# Altium PCB MB_v1.PcbDoc (part 1 of 10)
Units mm, origin at the board's own origin, x right, y up, seen from the top; angles counter-clockwise.
Board outline 203 x 72 mm, 6 copper layers (Top Layer, Layer 3, Layer 1, Layer 2, Layer 4, Bottom Layer), stack 1.52 mm thick; 655 components, 569 nets, 2943 pads, 1834 vias.
Unrouted connection lines stored in the file: 31.
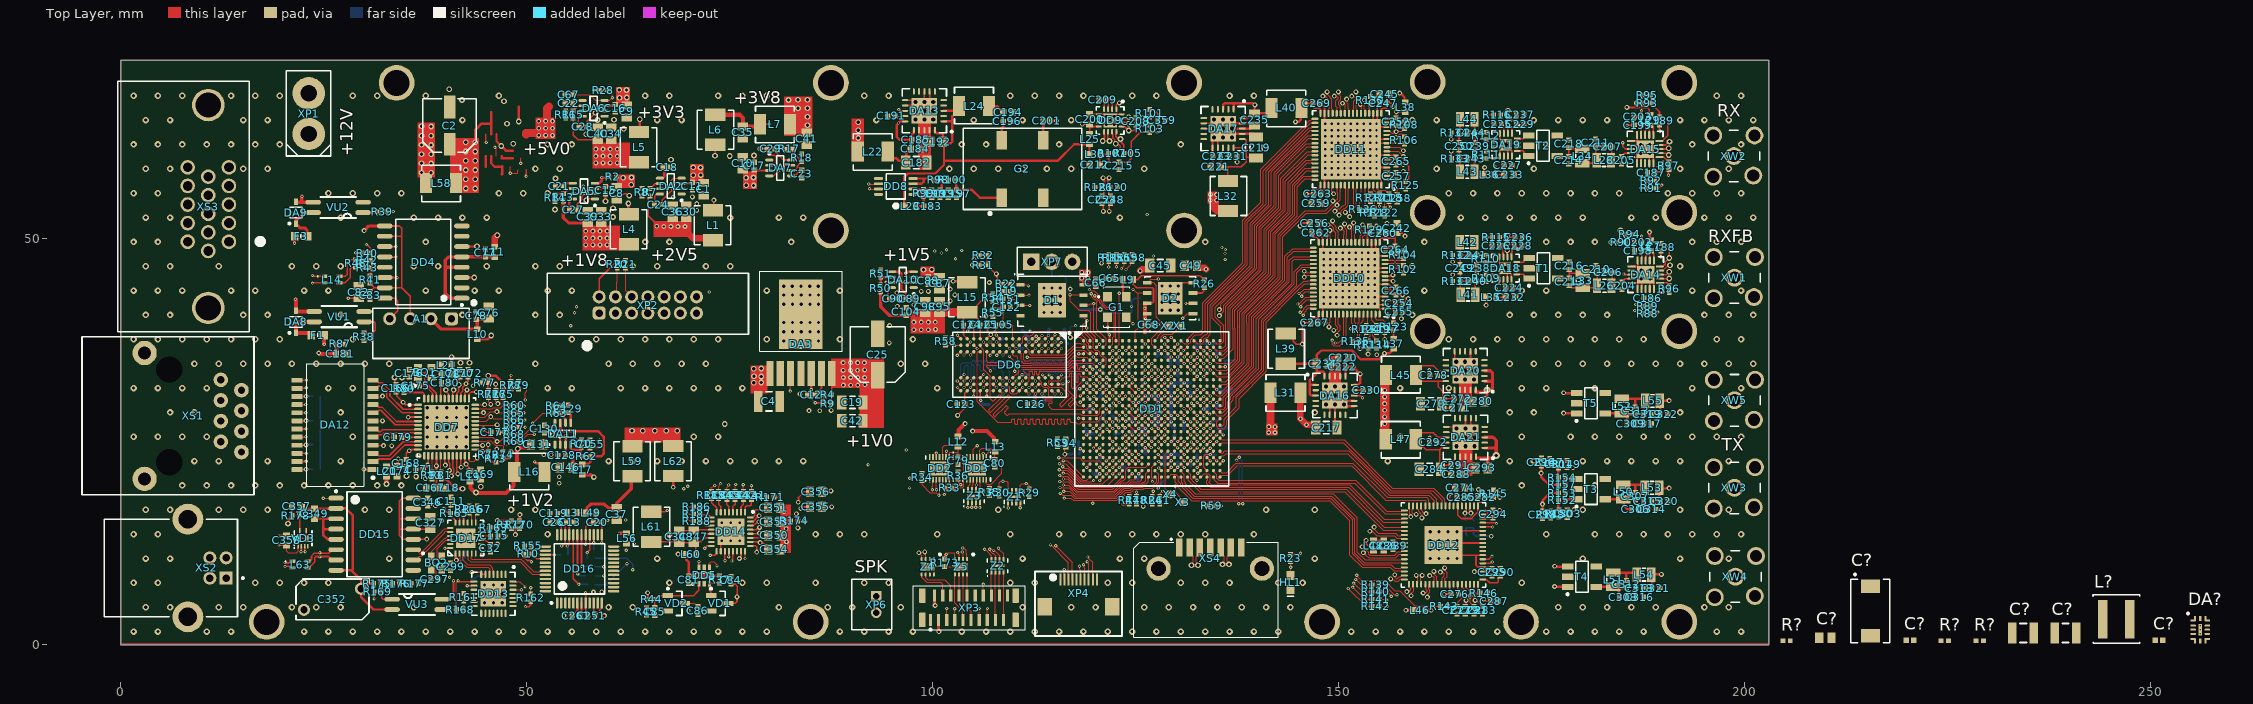
[diagram p0: Top Layer view]
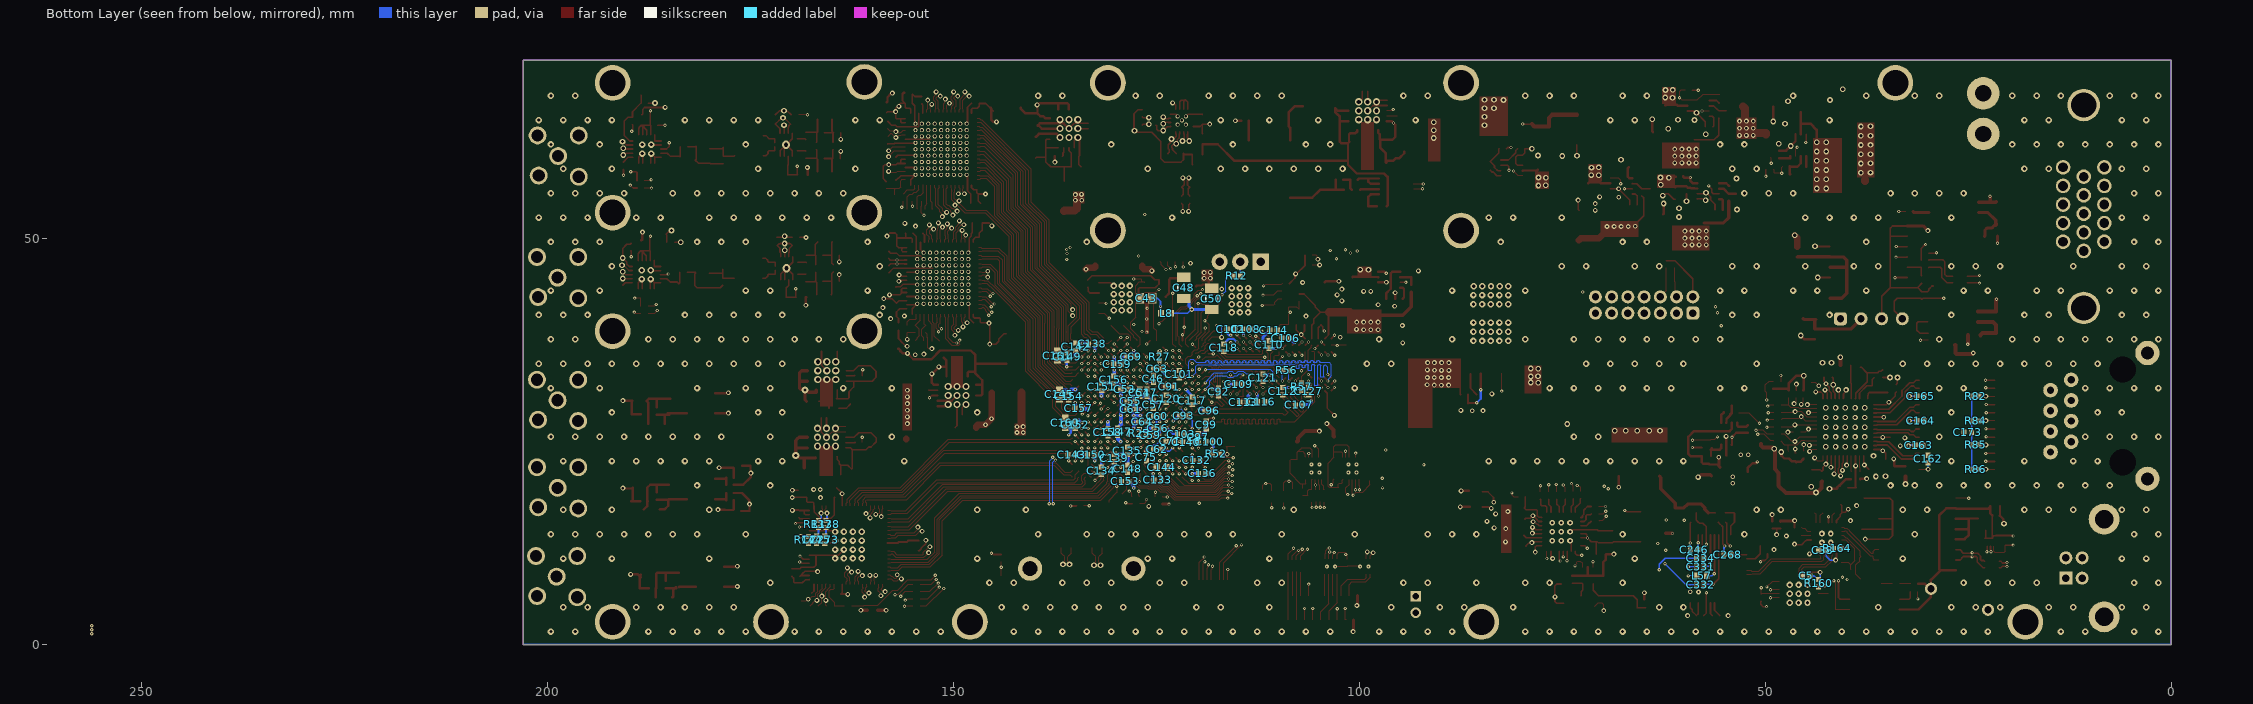
[diagram p1: Bottom Layer view, seen from below]
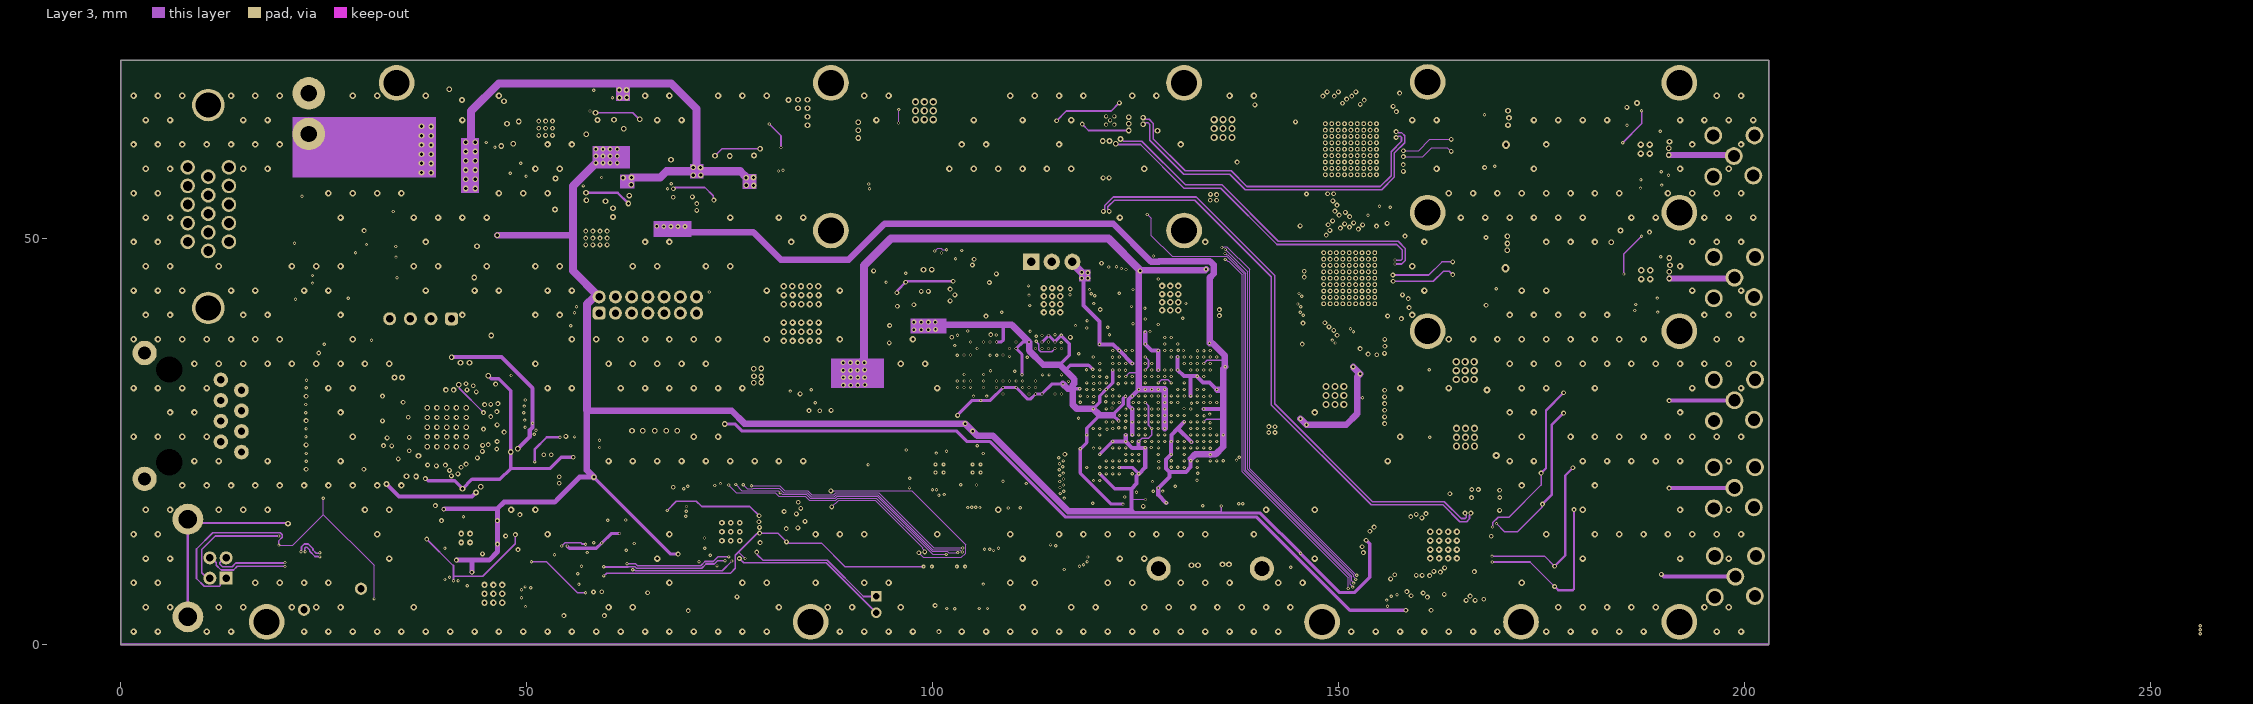
[diagram p2: Layer 3]
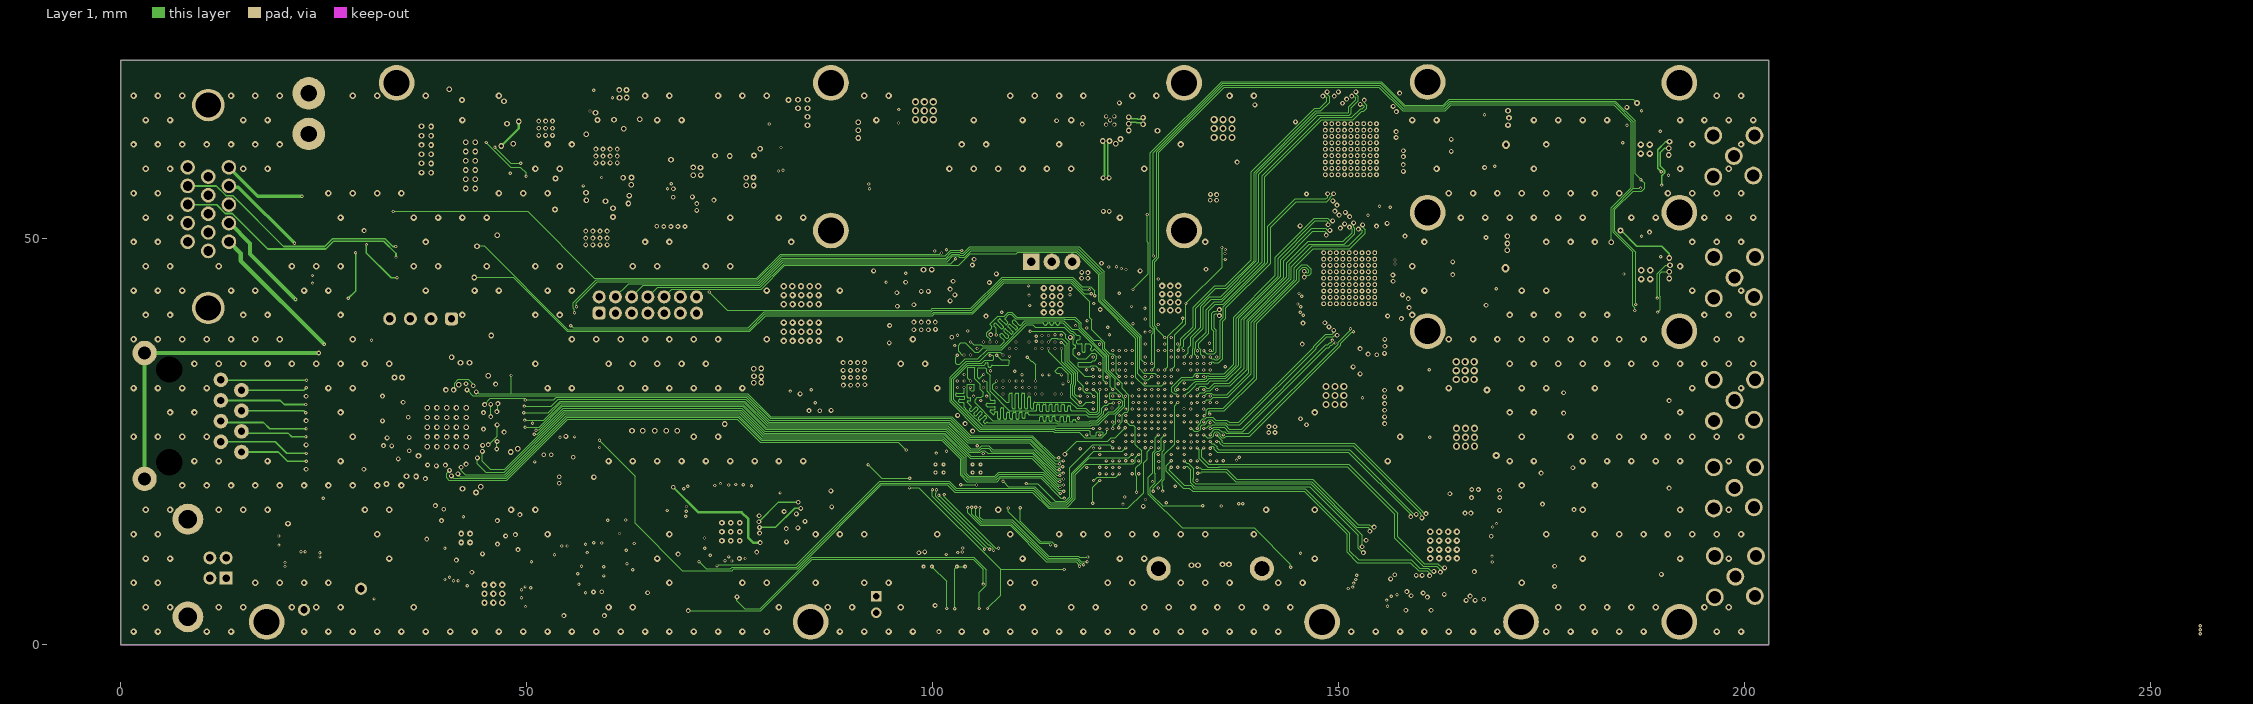
[diagram p3: Layer 1]
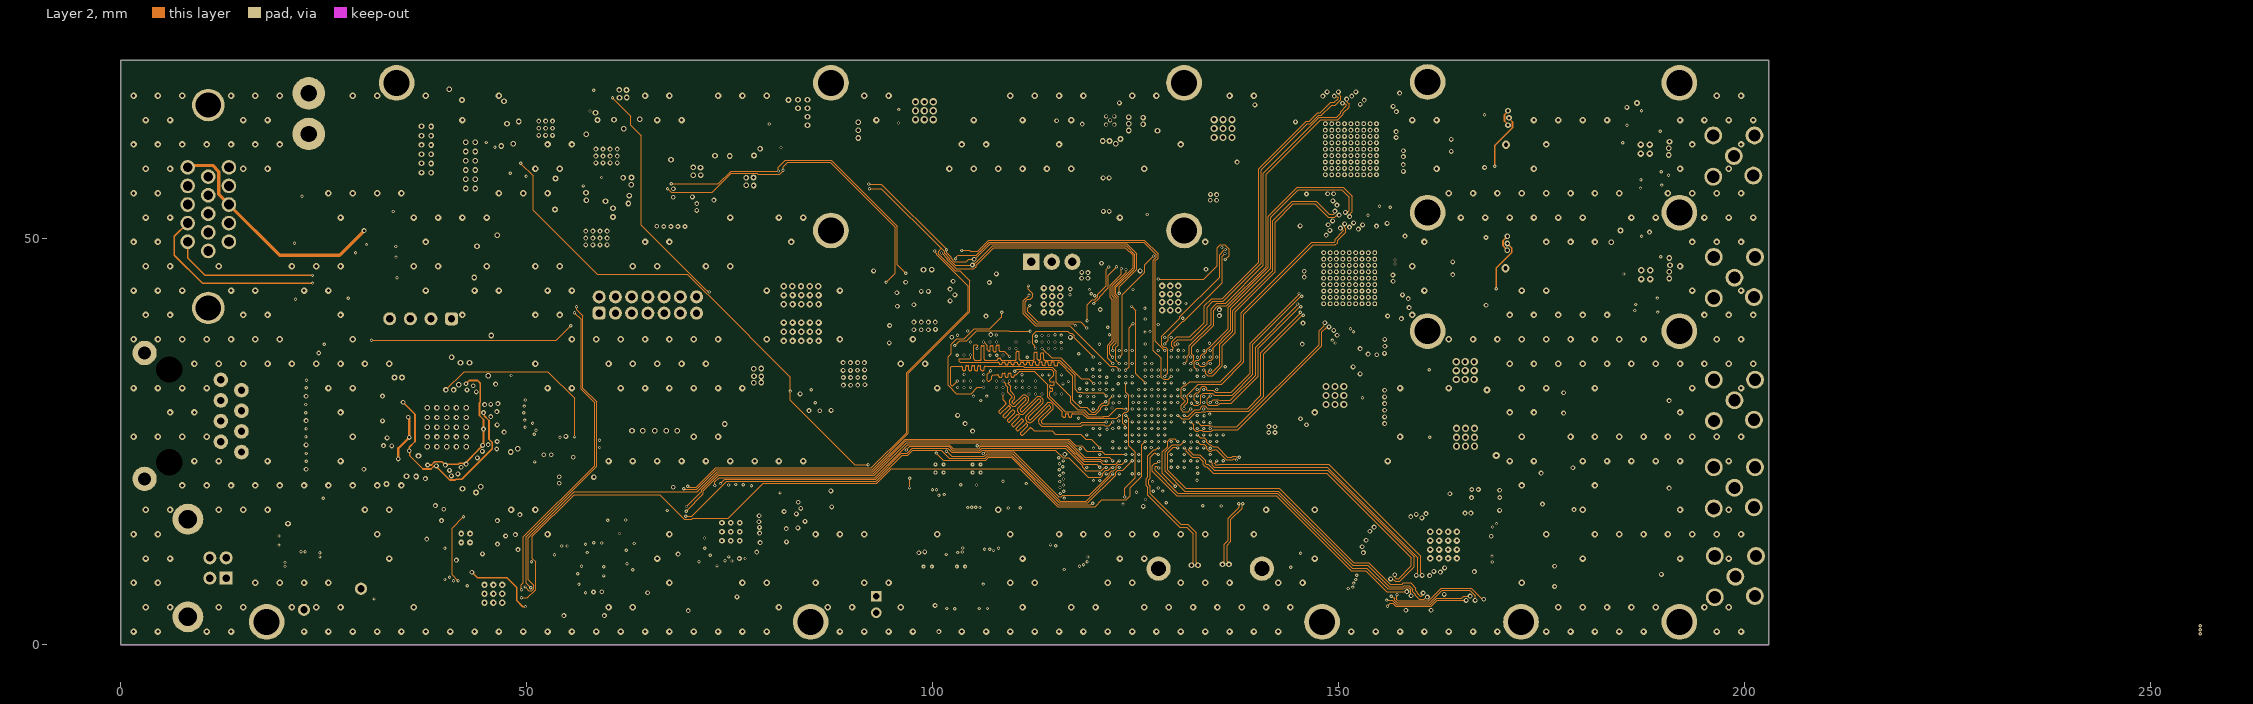
[diagram p4: Layer 2]
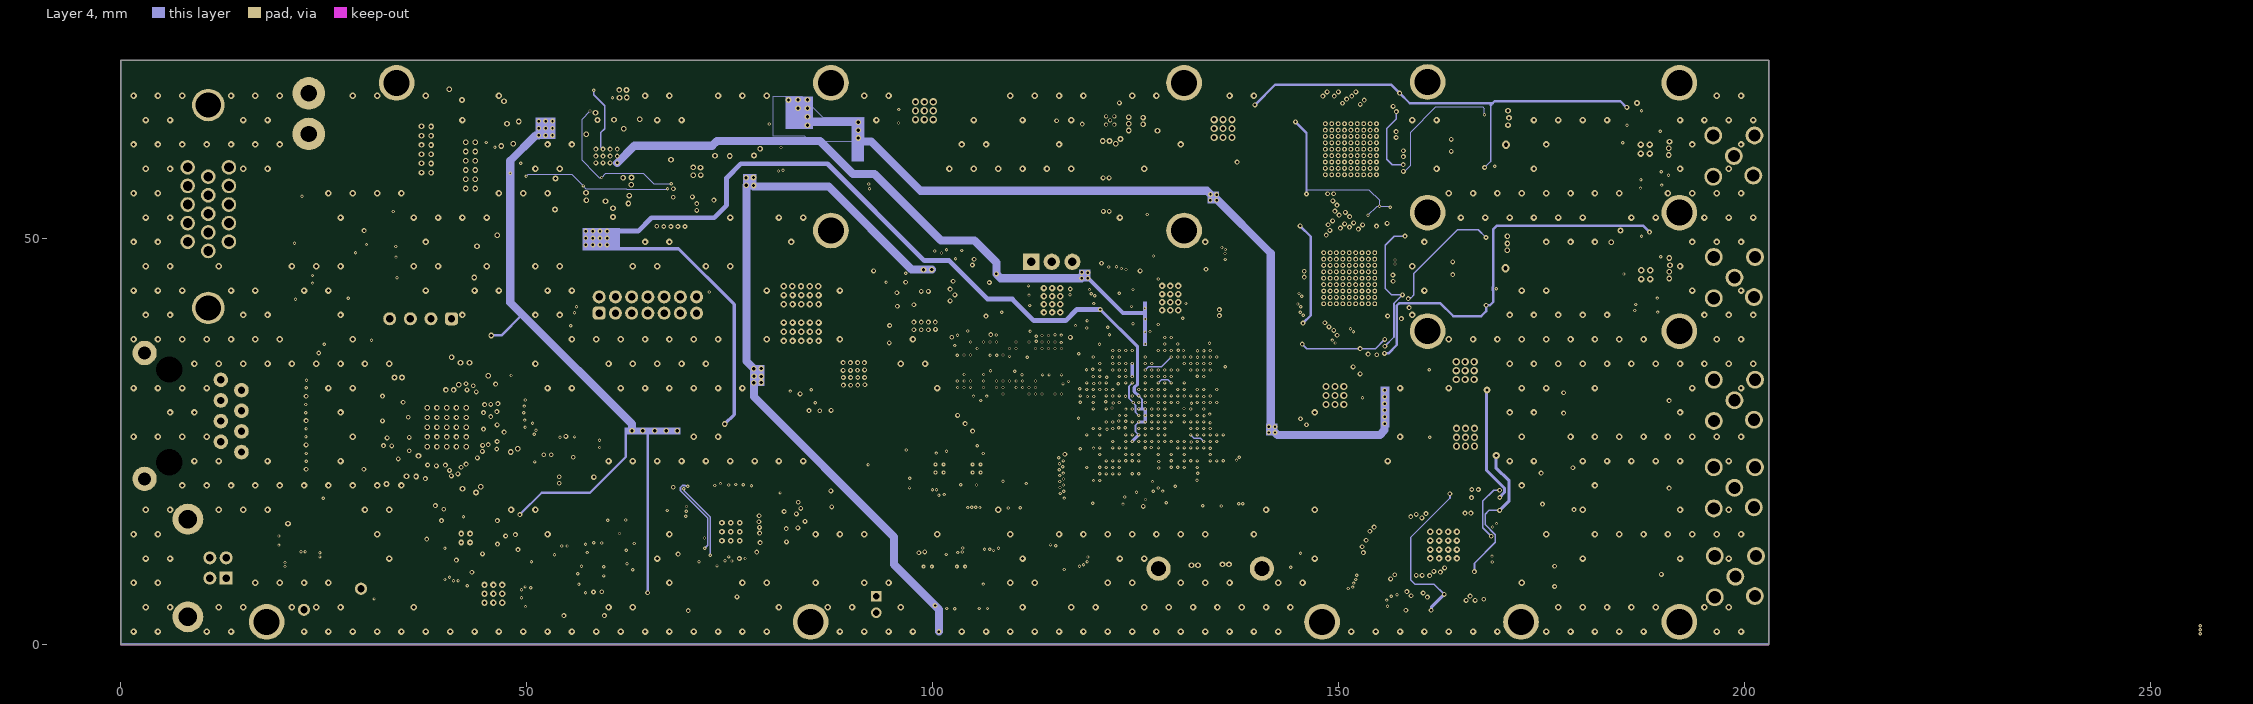
[diagram p5: Layer 4]
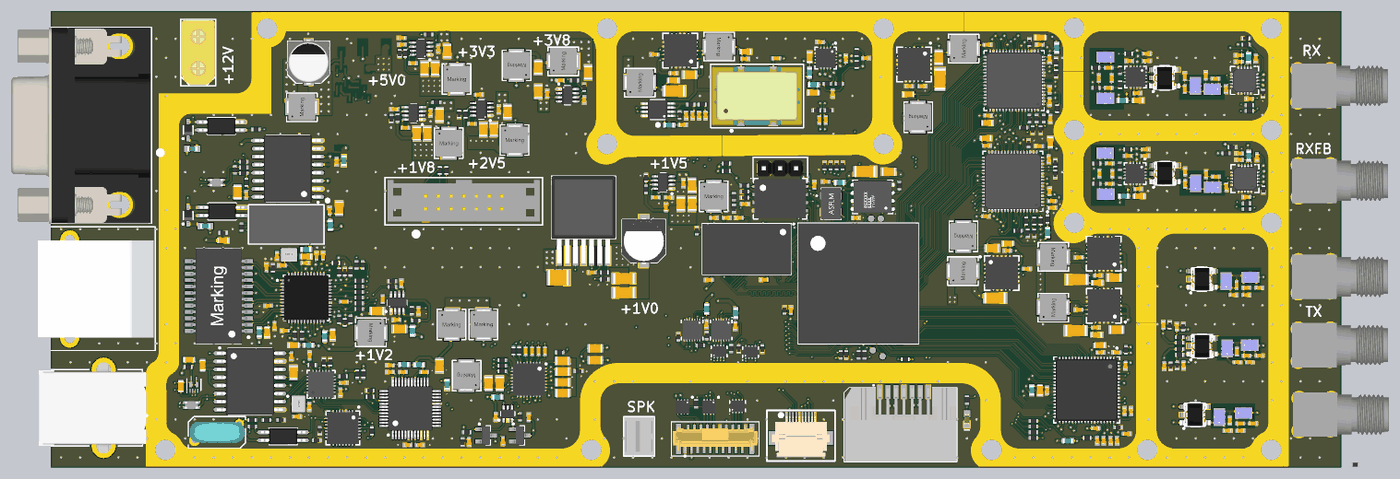
[diagram p14: 3D render of the assembled board from above, using the file's embedded part models]
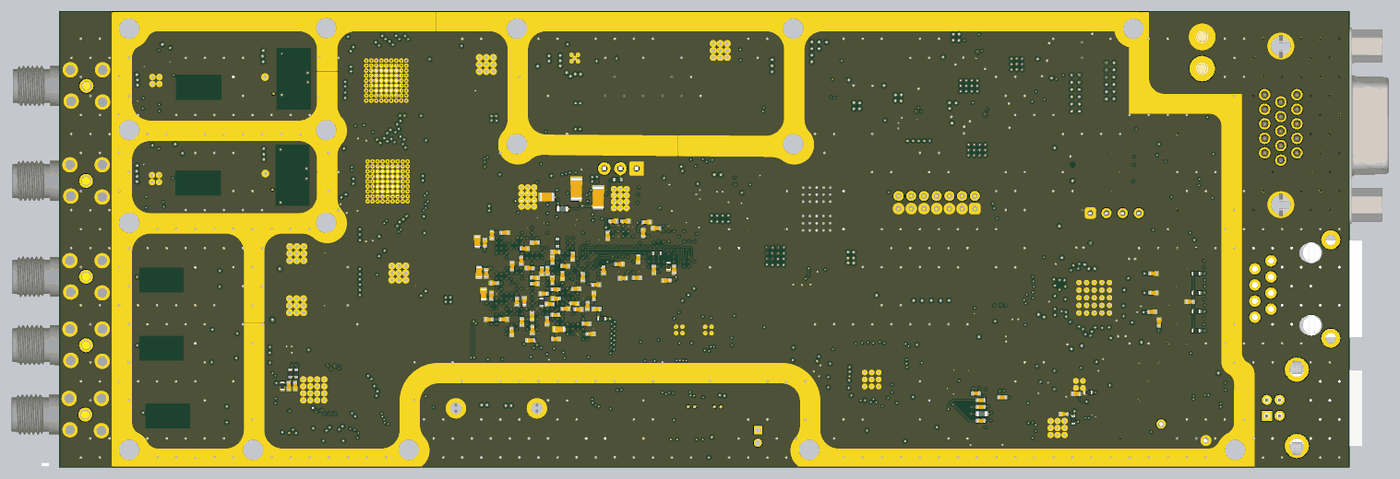
[diagram p15: 3D render of the assembled board from below, using the file's embedded part models]

## Layer stack, top to bottom
Top Solder: solder mask 0.0102, Solder Resist, Dk 3.5
Top Layer: signal copper 0.0356
Dielectric 2: prepreg 0.0965, PP-013, Dk 4.3
Layer 3: signal copper 0.018
Dielectric 4: core 0.5334, Core-037, Dk 4.8
Layer 1: signal copper 0.018
Dielectric 1: prepreg 0.1168, PP-016, Dk 4.4
Layer 2: signal copper 0.018
Dielectric 5: core 0.5334, Core-037, Dk 4.8
Layer 4: signal copper 0.018
Dielectric 3: prepreg 0.0965, PP-013, Dk 4.3
Bottom Layer: signal copper 0.0356
Bottom Solder: solder mask 0.0102, Solder Resist, Dk 3.5

## Board outline
0,0 0,72 203,72 203,0

## Design rules (kind name [scope] priority, off if disabled: settings)
Clearance [All] p1: gap=0.1 ignorepadtopadclearanceinfootprint=FALSE except(0.15: Arc-Fill Arc-Poly Arc-Region Track-Fill Track-Poly Track-Region SMDPad-Fill SMDPad-Poly SMDPad-Region THPad-Fill THPad-Poly THPad-Region Via-Fill Via-Poly Via-Region Fill-Fill Fill-Poly Fill-Region Poly-Poly Poly-Region Region-Region)
DiffPairsRouting [All] p1: maxlimit=0.254 minlimit=0.2 mostfreqgap=0.2 toplayer_minwidth=0.125 toplayer_maxwidth=0.5 toplayer_prefwidth=0.2 midlayer1_minwidth=0.125 midlayer1_maxwidth=0.5 midlayer1_prefwidth=0.2 midlayer2_minwidth=0.125 midlayer2_maxwidth=0.5 midlayer2_prefwidth=0.2 midlayer3_minwidth=0.125 midlayer3_maxwidth=0.5 midlayer3_prefwidth=0.2 midlayer4_minwidth=0.125 midlayer4_maxwidth=0.5 midlayer4_prefwidth=0.2 bottomlayer_minwidth=0.125 bottomlayer_maxwidth=0.5 bottomlayer_prefwidth=0.2 maxuncoupledlength=12.7
HoleSize [All] p1: absolutevalues=TRUE maxlimit=5 minlimit=0.2 maxpercent=80.000 minpercent=20.000
HoleToHoleClearance [All] p1: gap=0.3 allowstackedmicrovias=TRUE
MatchedLengths MatchedLengths_DDR_CLOCKS_STROBES [InxSignalClass('ADDR_PP1') OR InxSignalClass('DATA_BL0')] p1: tolerance=3 checknetsindiffpair=TRUE checkdiffpairvsdiffpair=FALSE checkxsignals=FALSE checkothers=FALSE
MatchedLengths MatchedLengths_DATA_BL0 [InxSignalClass('DATA_BL0')] p2: tolerance=3 checknetsindiffpair=FALSE checkdiffpairvsdiffpair=TRUE checkxsignals=TRUE checkothers=TRUE targetsourcename=DDR_D6_BL0
MatchedLengths MatchedLengths_ADDR_PP1 [InxSignalClass('ADDR_PP1')] p3: tolerance=3 checknetsindiffpair=FALSE checkdiffpairvsdiffpair=TRUE checkxsignals=TRUE checkothers=TRUE
MinimumSolderMaskSliver [All] p1: minsoldermaskwidth=0.125
PolygonConnect [All] p1: connectstyle=Direct reliefconductorwidth=0.254 reliefentries=4 polygonreliefangle="90 Angle" airgapwidth=0.254
RoutingTopology RoutingTopology_DDRAddressAndControls [InNetClass('DDR_AddressAndControls')] p1: topology=Daisy_Simple
RoutingTopology [All] p2: topology=Shortest
RoutingVias [All] p1: holewidth=0.4 width=0.7 viastyle="Through Hole" minholewidth=0.2 minwidth=0.4 maxholewidth=5 maxwidth=10
SolderMaskExpansion [All] p1: expansion=0.102 istentingtop=FALSE
SupplyNets "Schematic Supply Nets_97" [InNet('VDD_5V0')] p1: voltage=0.000
SupplyNets "Schematic Supply Nets_96" [InNet('PG_5V0')] p2: voltage=0.000
SupplyNets "Schematic Supply Nets_95" [InNet('VCC_12V0')] p3: voltage=0.000
SupplyNets "Schematic Supply Nets_94" [InNet('REGV')] p4: voltage=0.000
SupplyNets "Schematic Supply Nets_93" [InNet('USBD1_N')] p5: voltage=0.000
SupplyNets "Schematic Supply Nets_92" [InNet('AGND')] p6: voltage=0.000
SupplyNets "Schematic Supply Nets_91" [InNet('USBD1_P')] p7: voltage=0.000
SupplyNets "Schematic Supply Nets_90" [InNet('USBD2_P')] p8: voltage=0.000
SupplyNets "Schematic Supply Nets_89" [InNet('VBUS_ISO')] p9: voltage=0.000
SupplyNets "Schematic Supply Nets_88" [InNet('USBD2_N')] p10: voltage=0.000
SupplyNets "Schematic Supply Nets_87" [InNet('DDR_VREF')] p11: voltage=0.000
SupplyNets "Schematic Supply Nets_86" [InNet('ANALOG_3V8')] p12: voltage=0.000
SupplyNets "Schematic Supply Nets_85" [InNet('DAC_CLK_P')] p13: voltage=0.000
SupplyNets "Schematic Supply Nets_84" [InNet('ATT_LE1')] p14: voltage=0.000
SupplyNets "Schematic Supply Nets_83" [InNet('OUT_422A')] p15: voltage=0.000
SupplyNets "Schematic Supply Nets_82" [InNet('CHP')] p16: voltage=0.000
SupplyNets "Schematic Supply Nets_81" [InNet('ADC_MODE1')] p17: voltage=0.000
SupplyNets "Schematic Supply Nets_80" [InNet('DIS_RS422Z')] p18: voltage=0.000
SupplyNets "Schematic Supply Nets_79" [InNet('MIO2')] p19: voltage=0.000
SupplyNets "Schematic Supply Nets_78" [InNet('ATT_DATA')] p20: voltage=0.000
SupplyNets "Schematic Supply Nets_77" [InNet('OUT_GND')] p21: voltage=0.000
SupplyNets "Schematic Supply Nets_76" [InNet('ATT_LE0')] p22: voltage=0.000
SupplyNets "Schematic Supply Nets_75" [InNet('ADC_RAND0')] p23: voltage=0.000
SupplyNets "Schematic Supply Nets_74" [InNet('PWR_EN')] p24: voltage=0.000
SupplyNets "Schematic Supply Nets_73" [InNet('CON_RS422Z')] p25: voltage=0.000
SupplyNets "Schematic Supply Nets_72" [InNet('DDR_VREF2')] p26: voltage=0.000
SupplyNets "Schematic Supply Nets_71" [InNet('DIS_RMICN')] p27: voltage=0.000
SupplyNets "Schematic Supply Nets_70" [InNet('OUT_422Z')] p28: voltage=0.000
SupplyNets "Schematic Supply Nets_69" [InNet('CON_RS422A')] p29: voltage=0.000
SupplyNets "Schematic Supply Nets_68" [InNet('RMICN')] p30: voltage=0.000
SupplyNets "Schematic Supply Nets_67" [InNet('ADC_RAND1')] p31: voltage=0.000
SupplyNets "Schematic Supply Nets_66" [InNet('CON_TX_FAIL')] p32: voltage=0.000
SupplyNets "Schematic Supply Nets_65" [InNet('DACCLK_P')] p33: voltage=0.000
SupplyNets "Schematic Supply Nets_64" [InNet('VDD_2V5')] p34: voltage=0.000
SupplyNets "Schematic Supply Nets_63" [InNet('GND')] p35: voltage=0.000
SupplyNets "Schematic Supply Nets_62" [InNet('USBD_N')] p36: voltage=0.000
SupplyNets "Schematic Supply Nets_61" [InNet('RMICP')] p37: voltage=0.000
SupplyNets "Schematic Supply Nets_60" [InNet('LMICP')] p38: voltage=0.000
SupplyNets "Schematic Supply Nets_59" [InNet('PG_ETH0')] p39: voltage=0.000
SupplyNets "Schematic Supply Nets_58" [InNet('PTT_OUT_N')] p40: voltage=0.000
SupplyNets "Schematic Supply Nets_57" [InNet('ADC_CLK0_P')] p41: voltage=0.000
SupplyNets "Schematic Supply Nets_56" [InNet('DIS_RS422B')] p42: voltage=0.000
SupplyNets "Schematic Supply Nets_55" [InNet('DIS_RS422A')] p43: voltage=0.000
SupplyNets "Schematic Supply Nets_54" [InNet('ADC_LVDS1')] p44: voltage=0.000
SupplyNets "Schematic Supply Nets_51" [InNet('PG_1V5')] p45: voltage=0.000
SupplyNets "Schematic Supply Nets_50" [InNet('PTT_IN')] p46: voltage=0.000
SupplyNets "Schematic Supply Nets_49" [InNet('ATT_CLK')] p47: voltage=0.000
SupplyNets "Schematic Supply Nets_48" [InNet('ADC_DITH0')] p48: voltage=0.000
SupplyNets "Schematic Supply Nets_47" [InNet('ADC_CLK0_N')] p49: voltage=0.000
SupplyNets "Schematic Supply Nets_46" [InNet('RHP')] p50: voltage=0.000
SupplyNets "Schematic Supply Nets_45" [InNet('ETH0_1V2')] p51: voltage=0.000
SupplyNets "Schematic Supply Nets_44" [InNet('PG_ALL')] p52: voltage=0.000
SupplyNets "Schematic Supply Nets_43" [InNet('VMODE0')] p53: voltage=0.000
SupplyNets "Schematic Supply Nets_42" [InNet('MIO5')] p54: voltage=0.000
SupplyNets "Schematic Supply Nets_41" [InNet('LMICN')] p55: voltage=0.000
SupplyNets "Schematic Supply Nets_40" [InNet('DIS_LMICN')] p56: voltage=0.000
SupplyNets "Schematic Supply Nets_39" [InNet('ETH0_3V3')] p57: voltage=0.000
SupplyNets "Schematic Supply Nets_38" [InNet('I2C_SDA_3V3')] p58: voltage=0.000
SupplyNets "Schematic Supply Nets_37" [InNet('DAC_CVDD')] p59: voltage=0.000
SupplyNets "Schematic Supply Nets_36" [InNet('MIO3')] p60: voltage=0.000
SupplyNets "Schematic Supply Nets_35" [InNet('LHP')] p61: voltage=0.000
SupplyNets "Schematic Supply Nets_34" [InNet('MIO4')] p62: voltage=0.000
SupplyNets "Schematic Supply Nets_33" [InNet('VCC_5V0')] p63: voltage=0.000
SupplyNets "Schematic Supply Nets_32" [InNet('CON_TXON')] p64: voltage=0.000
SupplyNets "Schematic Supply Nets_31" [InNet('OUT_422Y')] p65: voltage=0.000
SupplyNets "Schematic Supply Nets_30" [InNet('ADC_LVDS0')] p66: voltage=0.000
SupplyNets "Schematic Supply Nets_29" [InNet('DIS_RMICP')] p67: voltage=0.000
SupplyNets "Schematic Supply Nets_28" [InNet('DAC_DCO_P')] p68: voltage=0.000
SupplyNets "Schematic Supply Nets_27" [InNet('CON_RS422B')] p69: voltage=0.000
SupplyNets "Schematic Supply Nets_26" [InNet('PTT_OUT_P')] p70: voltage=0.000
SupplyNets "Schematic Supply Nets_25" [InNet('ADC_CLK1_N')] p71: voltage=0.000
SupplyNets "Schematic Supply Nets_24" [InNet('TUNE_OUT_N')] p72: voltage=0.000
SupplyNets "Schematic Supply Nets_23" [InNet('USBD_P')] p73: voltage=0.000
SupplyNets "Schematic Supply Nets_22" [InNet('DAC_DCO_N')] p74: voltage=0.000
SupplyNets "Schematic Supply Nets_21" [InNet('OUT_422B')] p75: voltage=0.000
SupplyNets "Schematic Supply Nets_20" [InNet('MIO6')] p76: voltage=0.000
SupplyNets "Schematic Supply Nets_19" [InNet('DIS_LMICP')] p77: voltage=0.000
SupplyNets "Schematic Supply Nets_18" [InNet('ADC_CLK1_P')] p78: voltage=0.000
SupplyNets "Schematic Supply Nets_17" [InNet('DIS_RHP')] p79: voltage=0.000
SupplyNets "Schematic Supply Nets_16" [InNet('CON_RS422Y')] p80: voltage=0.000
SupplyNets "Schematic Supply Nets_15" [InNet('DIS_LHP')] p81: voltage=0.000
SupplyNets "Schematic Supply Nets_14" [InNet('VDD_3V3')] p82: voltage=0.000
SupplyNets "Schematic Supply Nets_13" [InNet('DIS_CW_KEY')] p83: voltage=0.000
SupplyNets "Schematic Supply Nets_12" [InNet('ADC_MODE0')] p84: voltage=0.000
SupplyNets "Schematic Supply Nets_11" [InNet('TUNE_OUT_P')] p85: voltage=0.000
SupplyNets "Schematic Supply Nets_10" [InNet('DACCLK_N')] p86: voltage=0.000
SupplyNets "Schematic Supply Nets_9" [InNet('DDR_1V5')] p87: voltage=0.000
SupplyNets "Schematic Supply Nets_8" [InNet('VDD_1V0')] p88: voltage=0.000
SupplyNets "Schematic Supply Nets_7" [InNet('ADC_DITH1')] p89: voltage=0.000
SupplyNets "Schematic Supply Nets_6" [InNet('DAC_CLK_N')] p90: voltage=0.000
SupplyNets "Schematic Supply Nets_5" [InNet('VDD_1V8')] p91: voltage=0.000
SupplyNets "Schematic Supply Nets_4" [InNet('DIS_RS422Y')] p92: voltage=0.000
SupplyNets "Schematic Supply Nets_3" [InNet('VMODE1')] p93: voltage=0.000
SupplyNets "Schematic Supply Nets_2" [InNet('DAC_DCI_N')] p94: voltage=0.000
SupplyNets "Schematic Supply Nets_1" [InNet('I2C_SCL_3V3')] p95: voltage=0.000
SupplyNets "Schematic Supply Nets" [InNet('DAC_DCI_P')] p96: voltage=0.000
Width [All] p1: maxlimit=5 minlimit=0.125 preferedwidth=0.2 minimp=50.000000 maximp=50.000000 favimp=50.000000
25 further rules are at their usual default settings.

## Classes and differential pairs
component class MB_pwr_in_v2: C1 C2 C4 C8 C9 C10 C11 C12 C15 C16 C17 C18 C19 C21 C22 C23 C24 C25 C27 C28 C29 C30 C33 C34 C35 C36 C39 C40 C41 C42 C43 C45 C46 C47 C48 C49 C50 C51 C53 C55 C56 C57 C59 C60 C61 C62 C63 C64 C? DA2 DA3 DA5 DA6 DA7 DA? L1 L4 L5 L6 L7 L8 L58 L? R2 R4 R7 R8 R9 R13 R14 R15 R16 R17 R18 R? XP1
component class MB_ps_io: A1 C65 C66 C67 C68 C69 C71 C75 C76 C77 C78 C79 C80 C81 C82 C83 C84 C85 C86 D1 D2 DA8 DA9 DD1 DD2 DD3 DD4 DD5 F1 F3 G1 HL1 L9 L10 L11 L12 L13 L14 R11 R12 R19 R20 R21 R22 R23 R24 R25 R26 R27 R28 R29 R30 R31 R32 R33 R34 R35 R36 R37 R38 R39 R40 R41 R42 R43 R44 R45 R46 R59 R151 R156 R158 R159 VD1 VD2 VU1 VU2 X1 X2 XP2 XP3 XP4 XP7 XS3 Z1 Z2 Z3
component class MB_pl_io: BQ1 C128 C129 C130 C131 C132 C133 C134 C135 C136 C138 C139 C140 C142 C143 C144 C145 C146 C147 C148 C149 C150 C151 C152 C153 C154 C155 C156 C157 C158 C159 C160 C161 C162 C163 C164 C165 C166 C167 C168 C169 C170 C171 C172 C173 C174 C175 C176 C177 C178 C179 C180 C181 DA11 DA12 DD7 L16 L17 L18 L19 L20 L21 R60 R61 R62 R63 R64 R65 R66 R67 R68 R69 R70 R71 R72 R73 R74 R75 R76 R77 R78 R79 R80 R81 R82 R83 R84 R85 R86 R87 X3 X4 XS1 XS4
component class MB_ddr: C87 C88 C89 C90 C91 C92 C93 C94 C95 C96 C97 C98 C99 C100 C101 C102 C103 C104 C105 C106 C107 C108 C109 C110 C112 C113 C114 C116 C117 C118 C120 C121 C122 C123 C124 C125 C126 C127 DA10 DD6 L15 R47 R48 R50 R51 R52 R53 R54 R55 R56 R57 R58
component class MB_dac: C270 C271 C272 C273 C274 C275 C276 C277 C278 C279 C280 C281 C282 C283 C284 C285 C286 C287 C288 C289 C290 C291 C292 C293 C294 C295 C296 C298 C301 C303 C306 C307 C308 C309 C312 C313 C314 C315 C316 C317 C318 C319 C320 C321 C322 DA20 DA21 DD12 L45 L46 L47 L48 L50 L51 L52 L53 L54 L55 R137 R138 R139 R140 R141 R142 R143 R144 R145 R146 R147 R148 R149 R150 R152 R153 R154 R157 T3 T4 T5 XW3 XW4 XW5
component class MB_audio: BQ2 C5 C13 C20 C26 C32 C37 C38 C111 C115 C119 C246 C251 C261 C268 C297 C299 C327 C331 C332 C334 C341 C342 C344 C345 C346 C347 C348 C349 C350 C351 C352 C353 C354 C355 C356 C357 C358 DD13 DD14 DD15 DD16 DD17 L3 L49 L56 L57 L59 L60 L61 L62 L63 R10 R155 R160 R161 R162 R163 R164 R165 R166 R167 R168 R169 R170 R171 R172 R173 R174 R175 R176 R177 R178 R184 R185 R186 R187 R188 VD3 VU3 XP6 XS2 Z4 Z5
component class MB_adc_clk: C182 C183 C184 C185 C186 C187 C188 C189 C190 C191 C192 C193 C194 C195 C196 C197 C198 C199 C200 C201 C202 C203 C204 C205 C206 C207 C208 C209 C210 C211 C212 C213 C214 C215 C216 C217 C218 C219 C220 C221 C222 C223 C224 C225 C226 C227 C228 C229 C230 C231 C232 C233 C234 C235 C236 C237 C238 C239 C240 C241 C242 C243 C244 C245 C247 C248 C249 C250 C252 C253 C254 C255 C256 C257 C258 C259 C260 C262 C263 C264 C265 C266 C267 C269 C359 DA13 DA14 DA15 DA16 DA17 DA18 DA19 DD8 DD9 DD10 DD11 G2 L22 L23 L24 L25 L26 L27 L28 L29 L30 L31 L32 L33 L34 L35 L36 L37 L38 L39 L40 L41 L42 L43 L44 R88 R89 R90 R91 R92 R93 R94 R95 R96 R97 R98 R99 R100 R101 R102 R103 R104 R105 R106 R107 R108 R109 R110 R111 R112 R113 R114 R115 R116 R117 R118 R119 R120 R121 R122 R123 R124 R125 R126 R127 R128 R129 R130 R131 R132 R133 R134 R135 R136 T1 T2 XW1 XW2
differential pair USBD2: +USBD2_P -USBD2_N
differential pair USBD1: +USBD1_P -USBD1_N
differential pair SERDATA: +SERDATA_P -SERDATA_N
differential pair SERCLK: +SERCLK_P -SERCLK_N
differential pair DACCLK: +DACCLK_P -DACCLK_N
differential pair ISO_USB: +ISO_USB_P -ISO_USB_N
differential pair _USBD: +_USBD_P -_USBD_N
differential pair USBD: +USBD_P -USBD_N
differential pair ETH0_TD3: +ETH0_TD3_P -ETH0_TD3_N
differential pair ETH0_TD2: +ETH0_TD2_P -ETH0_TD2_N
differential pair ETH0_TD1: +ETH0_TD1_P -ETH0_TD1_N
differential pair ETH0_TD0: +ETH0_TD0_P -ETH0_TD0_N
differential pair DDR_DQS1: +DDR_DQS1_P -DDR_DQS1_N
differential pair DDR_DQS0: +DDR_DQS0_P -DDR_DQS0_N
differential pair DDR_CK: +DDR_CK_P -DDR_CK_N
differential pair DAC_DCO: +DAC_DCO_P -DAC_DCO_N
differential pair DAC_DCI: +DAC_DCI_P -DAC_DCI_N
differential pair DAC_D15: +DAC_D15_P -DAC_D15_N
differential pair DAC_D14: +DAC_D14_P -DAC_D14_N
differential pair DAC_D13: +DAC_D13_P -DAC_D13_N
differential pair DAC_D12: +DAC_D12_P -DAC_D12_N
differential pair DAC_D11: +DAC_D11_P -DAC_D11_N
differential pair DAC_D10: +DAC_D10_P -DAC_D10_N
differential pair DAC_D9: +DAC_D9_P -DAC_D9_N
differential pair DAC_D8: +DAC_D8_P -DAC_D8_N
differential pair DAC_D7: +DAC_D7_P -DAC_D7_N
differential pair DAC_D6: +DAC_D6_P -DAC_D6_N
differential pair DAC_D5: +DAC_D5_P -DAC_D5_N
differential pair DAC_D4: +DAC_D4_P -DAC_D4_N
differential pair DAC_D3: +DAC_D3_P -DAC_D3_N
differential pair DAC_D2: +DAC_D2_P -DAC_D2_N
differential pair DAC_D1: +DAC_D1_P -DAC_D1_N
differential pair DAC_D0: +DAC_D0_P -DAC_D0_N
differential pair DAC_CLK: +DAC_CLK_P -DAC_CLK_N
differential pair CLKOUT1: +CLKOUT1_P -CLKOUT1_N
differential pair CLKOUT0: +CLKOUT0_P -CLKOUT0_N
differential pair ADC_CLK1: +ADC_CLK1_P -ADC_CLK1_N
differential pair ADC_CLK0: +ADC_CLK0_P -ADC_CLK0_N
differential pair ADC1_D15: +ADC1_D15_P -ADC1_D15_N
differential pair ADC1_D14: +ADC1_D14_P -ADC1_D14_N
differential pair ADC1_D13: +ADC1_D13_P -ADC1_D13_N
differential pair ADC1_D12: +ADC1_D12_P -ADC1_D12_N
differential pair ADC1_D11: +ADC1_D11_P -ADC1_D11_N
differential pair ADC1_D10: +ADC1_D10_P -ADC1_D10_N
differential pair ADC1_D9: +ADC1_D9_P -ADC1_D9_N
differential pair ADC1_D8: +ADC1_D8_P -ADC1_D8_N
differential pair ADC1_D7: +ADC1_D7_P -ADC1_D7_N
differential pair ADC1_D6: +ADC1_D6_P -ADC1_D6_N
differential pair ADC1_D5: +ADC1_D5_P -ADC1_D5_N
differential pair ADC1_D4: +ADC1_D4_P -ADC1_D4_N
differential pair ADC1_D3: +ADC1_D3_P -ADC1_D3_N
differential pair ADC1_D2: +ADC1_D2_P -ADC1_D2_N
differential pair ADC1_D1: +ADC1_D1_P -ADC1_D1_N
differential pair ADC1_D0: +ADC1_D0_P -ADC1_D0_N
differential pair ADC0_D15: +ADC0_D15_P -ADC0_D15_N
differential pair ADC0_D14: +ADC0_D14_P -ADC0_D14_N
differential pair ADC0_D13: +ADC0_D13_P -ADC0_D13_N
differential pair ADC0_D12: +ADC0_D12_P -ADC0_D12_N
differential pair ADC0_D11: +ADC0_D11_P -ADC0_D11_N
differential pair ADC0_D10: +ADC0_D10_P -ADC0_D10_N
differential pair ADC0_D9: +ADC0_D9_P -ADC0_D9_N
differential pair ADC0_D8: +ADC0_D8_P -ADC0_D8_N
differential pair ADC0_D7: +ADC0_D7_P -ADC0_D7_N
differential pair ADC0_D6: +ADC0_D6_P -ADC0_D6_N
differential pair ADC0_D5: +ADC0_D5_P -ADC0_D5_N
differential pair ADC0_D4: +ADC0_D4_P -ADC0_D4_N
differential pair ADC0_D3: +ADC0_D3_P -ADC0_D3_N
differential pair ADC0_D2: +ADC0_D2_P -ADC0_D2_N
differential pair ADC0_D1: +ADC0_D1_P -ADC0_D1_N
differential pair ADC0_D0: +ADC0_D0_P -ADC0_D0_N

## Components (designator, comment, footprint, x,y, rotation, side; value= is the part's Value field where it differs from the comment)
A1 "AM1/4S-0505SZ" "SERIES AM1/4S-Z" 40.767,40.132 r180 top
BQ1 "25МГц" "ABRACOM ABM10" 37.465,33.528 r0 top
BQ2 "24МГц" "ABRACOM ABM10" 38.9,10.05 r270 top
C1 "22мк" CAPC2012X12L 71.832,56.095 r90 top
C2 "33мк" CAPAE7664X77L 40.525,63.925 r90 top
C4 "10мк" CAPC3225X27L 79.85,29.95 r180 top
C5 "0.1мк" CAPC1005X06N 44.975,8.45 r180 bottom
C8 "22мк" CAPC2012X12L 61.14,55.595 r90 top
C9 "22мк" CAPC2012X12L 62.334,65.668 r90 top
C10 "22мк" CAPC2012X12L 76.663,59.274 r270 top
C11 "0.1мк" CAPC1005X06N 70.435,56.476 r90 top
C12 "0.022мк" CAPC1005X06N 85.1,30.775 r0 top
C13 "1мк" CAPC1005X06N 55.375,15.075 r180 top
C15 "0.1мк" CAPC1005X06N 59.743,55.976 r90 top
C16 "0.1мк" CAPC1005X06N 60.937,66.049 r90 top
C17 "0.1мк" CAPC1005X06N 78.06,58.953 r270 top
C18 "8200" CAPC1005X06N 67.31,58.8 r180 top
C19 "100мк" CAPC3216X19L 90.15,29.825 r0 top
C20 "0.1мк" CAPC1005X06N 58.725,15.075 r180 top
C21 "8200" CAPC1005X06N 54.028,56.484 r0 top
C22 "8200" CAPC1005X06N 55.222,66.682 r0 top
C23 "8200" CAPC1005X06N 83.902,57.971 r90 top
C24 "0.1мк" CAPC1005X06N 66.244,54.19 r180 top
C25 "390мк" CAPAE7266X61N 93.275,35.725 r90 top
C26 "1мк" CAPC1005X06N 53.35,15.075 r180 top
C27 "0.1мк" CAPC1005X06N 55.758,53.563 r180 top
C28 "0.1мк" CAPC1005X06N 56.952,63.761 r180 top
C29 "0.1мк" CAPC1005X06N 80.092,61.052 r0 top
C30 "22мк" CAPC2012X12L 69.673,53.313 r270 top
C32 "0.1мк" CAPC1005X06N 45.55,11.85 r90 top
C33 "22мк" CAPC2012X12L 59.196,52.674 r270 top
C34 "22мк" CAPC2012X12L 60.437,62.92 r270 top
C35 "22мк" CAPC2012X12L 76.663,63.084 r90 top
C36 "22мк" CAPC2012X12L 68.022,53.301 r270 top
C37 "4.7мк" CAPC2012X12L 61.125,16.075 r270 top
C38 "0.1мк" CAPC1005X06N 42.975,11.625 r180 bottom
C39 "22мк" CAPC2012X12L 57.545,52.674 r270 top
C40 "22мк" CAPC2012X12L 58.786,62.92 r270 top
C41 "22мк" CAPC2012X12L 84.525,62.3 r90 top
C42 "100мк" CAPC3216X19L 90.15,27.575 r0 top
C43 "22мк" CAPC2012X12L 126.283,42.672 r180 bottom
C45 "100мк" CAPC3216X19L 128.075,46.675 r180 top
C46 "0.1мк" CAPC1005X06N 125.4,32.725 r270 bottom
C47 "0.1мк" CAPC1005X06N 126.198,31.028 r90 bottom
C48 "100мк" CAPC3216X19L 121.65,43.925 r270 bottom
C49 "22мк" CAPC2012X12L 131.825,46.65 r0 top
C50 "100мк" CAPC3216X19L 118.2,42.575 r270 bottom
C51 "0.1мк" CAPC1005X06N 127.075,31 r90 bottom
C53 "0.1мк" CAPC1005X06N 128.95,31.45 r180 bottom
C55 "0.1мк" CAPC1005X06N 128.2,29.95 r0 bottom
C56 "0.1мк" CAPC1005X06N 124.858,26.666 r180 bottom
C57 "0.1мк" CAPC1005X06N 125.425,29.525 r270 bottom
C59 "0.1мк" CAPC1005X06N 125.804,25.777 r180 bottom
C60 "0.1мк" CAPC1005X06N 124.925,28.125 r180 bottom
C61 "0.1мк" CAPC1005X06N 128.187,28.99 r0 bottom
C62 "0.1мк" CAPC1005X06N 124.942,24.072 r0 bottom
C63 "0.1мк" CAPC1005X06N 124.9,34 r180 bottom
C64 "0.1мк" CAPC1005X06N 126.75,27.425 r180 bottom
C65 "0.1мк" CAPC1005X06N 121.865,45.1 r0 top
C66 "0.1мк" CAPC1005X06N 120.125,44.575 r270 top
C67 "0.1мк" CAPC1005X06N 55.192,67.737 r0 top
C68 "0.1мк" CAPC1005X06N 126.637,39.37 r180 top
C69 "0.1мк" CAPC1005X06N 128.15,35.475 r180 bottom
C71 "0.1мк" CAPC1005X06N 123.35,25.05 r0 bottom
C75 "0.1мк" CAPC1005X06N 126.25,23.1 r90 bottom
C76 "22мк" CAPC2012X12L 45.339,40.894 r270 top
C77 "1мк" CAPC1005X06N 44.942,48.232 r270 top
C78 "0.1мк" CAPC1005X06N 43.815,40.513 r270 top
C79 "1мк" CAPC1005X06N 103.15,22.625 r90 top
C80 "1мк" CAPC1005X06N 107.675,22.325 r90 top
C81 "0.1мк" CAPC1005X06N 69.977,8.001 r90 top
C82 "22мк" CAPC2012X12L 29.337,43.422 r270 top
C83 "0.1мк" CAPC1005X06N 30.734,43.005 r270 top
C84 "1000" CAPC1005X06N 75.175,7.925 r270 top
C85 "1000" CAPC1005X06N 65.786,4.064 r90 top
C86 "0.01мк" CAPC1005X06N 71.12,4.191 r90 top
C87 "22мк" CAPC2012X12L 100.873,44.504 r90 top
C88 "1мк" CAPC1005X06N 99.476,44.837 r90 top
C89 "8200" CAPC1005X06N 97.19,42.599 r180 top
C90 "0.1мк" CAPC1005X06N 95.158,42.599 r180 top
C91 "0.1мк" CAPC1005X06N 123.432,31.771 r0 bottom
C92 "0.1мк" CAPC1005X06N 117.366,31.115 r90 bottom
C93 "0.1мк" CAPC1005X06N 121.684,28.187 r0 bottom
C94 "0.1мк" CAPC1005X06N 116.425,24.825 r270 top
C95 "22мк" CAPC2012X12L 100.873,41.583 r270 top
C96 "0.1мк" CAPC1005X06N 118.543,28.825 r0 bottom
C97 "0.1мк" CAPC1005X06N 119.878,25.507 r90 bottom
C98 "22мк" CAPC2012X12L 99.095,41.583 r270 top
C99 "0.1мк" CAPC1005X06N 118.89,27.051 r270 bottom
C100 "0.1мк" CAPC1005X06N 118.451,25.013 r180 bottom
C101 "0.1мк" CAPC1005X06N 122.21,33.302 r90 bottom
C102 "0.1мк" CAPC1005X06N 115.842,38.862 r0 bottom
C103 "0.1мк" CAPC1005X06N 121.975,25.9 r0 bottom
C104 "0.1мк" CAPC1005X06N 96.775,41.025 r270 top
C105 "0.1мк" CAPC1005X06N 108.253,39.37 r0 top
C106 "1мк" CAPC1005X06N 109.103,37.745 r180 bottom
C107 "1мк" CAPC1005X06N 107.441,29.523 r180 bottom
C108 "1мк" CAPC1005X06N 113.937,38.862 r0 bottom
C109 "1мк" CAPC1005X06N 114.882,32.082 r0 bottom
C110 "0.1мк" CAPC1005X06N 111.143,36.957 r270 bottom
C111 "0.1мк" CAPC1005X06N 40.7,17.675 r270 top
C112 "0.1мк" CAPC1005X06N 109.46,31.198 r90 bottom
C113 "0.1мк" CAPC1005X06N 114.301,29.845 r180 bottom
C114 "0.1мк" CAPC1005X06N 110.591,38.718 r0 bottom
C115 "1мк" CAPC1005X06N 46.025,13.375 r180 top
C116 "0.1мк" CAPC1005X06N 112.123,29.912 r0 bottom
C117 "0.1мк" CAPC1005X06N 120.609,30.047 r90 bottom
C118 "0.1мк" CAPC1005X06N 116.731,36.576 r90 bottom
C119 "0.1мк" CAPC1005X06N 53.35,16.15 r0 top
C120 "0.1мк" CAPC1005X06N 123.823,30.271 r90 bottom
C121 "0.1мк" CAPC1005X06N 111.902,32.868 r90 bottom
C122 "0.1мк" CAPC1005X06N 109.175,41.575 r0 top
C123 "0.1мк" CAPC1005X06N 103.523,29.591 r0 top
C124 "0.1мк" CAPC1005X06N 104.285,39.37 r180 top
C125 "0.1мк" CAPC1005X06N 106.317,39.37 r180 top
C126 "0.1мк" CAPC1005X06N 112.17,29.612 r0 top
C127 "0.1мк" CAPC1005X06N 106.256,31.229 r270 bottom
C128 "1мк" CAPC1005X06N 54.356,23.299 r0 top
C129 "8200" CAPC1005X06N 55.118,29.062 r270 top
C130 "0.1мк" CAPC1005X06N 52.197,26.553 r90 top
C131 "22мк" CAPC2012X12L 51.32,24.696 r180 top
C132 "0.1мк" CAPC1005X06N 120.059,22.686 r0 bottom
C133 "0.1мк" CAPC1005X06N 124.875,20.275 r0 bottom
C134 "0.1мк" CAPC1005X06N 131.825,21.41 r90 bottom
C135 "0.1мк" CAPC1005X06N 128.6,23.873 r270 bottom
C136 "0.1мк" CAPC1005X06N 119.398,21.082 r0 bottom
C138 "0.1мк" CAPC1005X06N 132.923,37.037 r0 bottom
C139 "0.1мк" CAPC1005X06N 130.225,22.975 r90 bottom
C140 "0.1мк" CAPC1005X06N 121.325,24.95 r0 bottom
C142 "0.1мк" CAPC1005X06N 134.95,36.675 r90 bottom
C143 "0.1мк" CAPC1005X06N 135.44,23.37 r180 bottom
C144 "10мк" CAPC1608X08L 124.375,21.825 r180 bottom
C145 "10мк" CAPC1608X08L 136.975,30.813 r90 bottom
C146 "47мк" CAPC2012X12L 54.85,21.85 r0 top
C147 "0.1мк" CAPC1005X06N 129.812,26.225 r270 bottom
C148 "0.1мк" CAPC1005X06N 128.575,21.675 r90 bottom
C149 "0.1мк" CAPC1005X06N 136.025,35.45 r270 bottom
C150 "0.1мк" CAPC1005X06N 133.049,23.37 r0 bottom
C151 "0.1мк" CAPC1005X06N 131.754,31.763 r270 bottom
C152 "0.1мк" CAPC1005X06N 135.024,27.07 r270 bottom
C153 "0.1мк" CAPC1005X06N 128.873,20.092 r180 bottom
C154 "0.1мк" CAPC1005X06N 135.825,30.601 r90 bottom
C155 "0.1мк" CAPC1005X06N 57.825,24.7 r90 top
C156 "0.1мк" CAPC1005X06N 130.3,32.625 r90 bottom
C157 "0.1мк" CAPC1005X06N 134.575,29.1 r180 bottom
C158 "0.1мк" CAPC1005X06N 131,26.15 r90 bottom
C159 "0.1мк" CAPC1005X06N 129.825,34.525 r0 bottom
C160 "10мк" CAPC1608X08L 136.25,27.32 r270 bottom
C161 "10мк" CAPC1608X08L 137.225,35.6 r270 bottom
C162 "0.01мк" CAPC1005X06N 29.972,22.86 r270 bottom
C163 "0.01мк" CAPC1005X06N 31.091,24.551 r0 bottom
C164 "0.01мк" CAPC1005X06N 30.861,27.559 r0 bottom
C165 "0.01мк" CAPC1005X06N 30.861,30.607 r0 bottom
C166 "0.1мк" CAPC1005X06N 33.909,31.575 r270 top
C167 "10мк" CAPC1608X08L 38.227,19.304 r0 top
C168 "0.1мк" CAPC1005X06N 35.179,22.352 r90 top
C169 "10мк" CAPC1608X08L 44.323,20.955 r90 top
C170 "0.1мк" CAPC1005X06N 41.783,33.401 r270 top
C171 "0.1мк" CAPC1005X06N 36.83,21.59 r0 top
C172 "0.1мк" CAPC1005X06N 42.799,33.401 r270 top
C173 "1000" CAPC1005X06N 25.098,26.162 r0 bottom
C174 "10мк" CAPC1608X08L 34.036,21.336 r90 top
C175 "10" CAPC1005X06N 36.37,31.877 r0 top
C176 "10" CAPC1005X06N 35.56,33.401 r90 top
C177 "0.1мк" CAPC1005X06N 46.101,26.162 r180 top
C178 "10мк" CAPC1608X08L 40.132,33.274 r180 top
C179 "0.1мк" CAPC1005X06N 34.163,25.527 r0 top
C180 "0.1мк" CAPC1005X06N 40.005,32.258 r180 top
C181 "0.1мк" CAPC1608X08L 27.075,35.8 r0 top
C182 "100мк" CAPC3216X19L 98.025,59.375 r180 top
C183 "1мк" CAPC1005X06N 99.417,54.017 r0 top
C184 "10мк" CAPC1608X08L 97.9,61.05 r180 top
C185 "0.1мк" CAPC1005X06N 97.925,62.2 r180 top
C186 "100" CAPC1005X06N 188.097,42.672 r0 top
C187 "100" CAPC1005X06N 188.55,58.142 r0 top
C188 "100" CAPC1005X06N 189.748,48.943 r90 top
C189 "100" CAPC1005X06N 189.566,64.492 r90 top
C190 "1мк" CAPC1005X06N 99.925,55.541 r270 top
C191 "1мк" CAPC1005X06N 94.95,65.125 r0 top
C192 "47мк" CAPC2012X12L 100.525,61.925 r0 top
C193 "1мк" CAPC1005X06N 100.941,55.541 r270 top
C194 "10мк" CAPC1608X08L 109.315,65.574 r180 top
C195 "0.01мк" CAPC1005X06N 101.957,55.541 r270 top
C196 "0.1мк" CAPC1005X06N 109.188,64.431 r180 top
C197 "2.2мк" CAPC1005X06N 102.973,55.541 r90 top
C198 "100" CAPC1005X06N 186.954,48.514 r0 top
C199 "100" CAPC1005X06N 186.899,63.984 r0 top
C200 "10мк" CAPC1608X08L 119.359,64.697 r270 top
C201 "0.01мк" CAPC1005X06N 114.1,64.525 r180 top
C202 "0.1мк" CAPC1005X06N 186.954,49.53 r0 top
C203 "0.1мк" CAPC1005X06N 186.899,65 r0 top
C204 "56" CAPC1005X06N 184.922,44.196 r90 top
C205 "56" CAPC1005X06N 184.867,59.666 r90 top
C206 "13" CAPC1005X06N 183.271,45.847 r0 top
C207 "13" CAPC1005X06N 183.216,61.317 r0 top
C208 "0.1мк" CAPC1005X06N 125.074,64.443 r270 top
C209 "0.01мк" CAPC1005X06N 120.999,67.098 r180 top
C210 "91" CAPC1005X06N 181.747,46.228 r270 top
C211 "91" CAPC1005X06N 181.692,61.825 r270 top
C212 "10мк" CAPC1608X08L 119.983,59.097 r0 top
C213 "43" CAPC1005X06N 178.445,44.704 r270 top
C214 "43" CAPC1005X06N 178.39,59.666 r270 top
C215 "0.1мк" CAPC1005X06N 122.989,58.97 r90 top
C216 "39" CAPC1005X06N 178.445,46.657 r270 top
C217 "100мк" CAPC3216X19L 148.525,26.725 r180 top
C218 "39" CAPC1005X06N 178.39,61.698 r270 top
C219 "100мк" CAPC3216X19L 139.875,61.225 r270 top
C220 "10мк" CAPC1608X08L 150.599,35.338 r0 top
C221 "10мк" CAPC1608X08L 134.912,58.857 r0 top
C222 "0.1мк" CAPC1005X06N 150.472,34.195 r0 top
C223 "0.1мк" CAPC1005X06N 135.039,60.127 r0 top
C224 "0.1мк" CAPC1005X06N 171.079,43.942 r180 top
C225 "0.1мк" CAPC1005X06N 169.627,64.111 r0 top
C226 "0.1мк" CAPC1005X06N 169.428,49.149 r0 top
C227 "0.1мк" CAPC1005X06N 170.897,59.031 r180 top
C228 "1мк" CAPC1005X06N 172.174,49.149 r180 top
C229 "1мк" CAPC1005X06N 172.421,64.111 r180 top
C230 "1мк" CAPC1005X06N 153.525,31.325 r180 top
C231 "1мк" CAPC1005X06N 137.071,60.127 r180 top
C232 "10мк" CAPC1608X08L 171.206,42.799 r180 top
C233 "10мк" CAPC1608X08L 171.024,57.888 r180 top
C234 "47мк" CAPC2012X12L 148.071,34.576 r180 top
C235 "47мк" CAPC2012X12L 139.675,64.675 r90 top
C236 "0.1мк" CAPC1005X06N 172.222,50.165 r180 top
C237 "0.1мк" CAPC1005X06N 172.421,65.254 r180 top
C238 "30" CAPC1005X06N 167.001,46.326 r270 top
C239 "30" CAPC1005X06N 166.898,61.396 r270 top
C240 "10" CAPC1005X06N 166.575,44.75 r0 top
C241 "10" CAPC1005X06N 166.582,47.95 r0 top
C242 "10мк" CAPC1608X08L 157.225,51.3 r270 top
C243 "10" CAPC1005X06N 166.39,59.872 r0 top
C244 "10" CAPC1005X06N 166.39,63.047 r0 top
C245 "10мк" CAPC1608X08L 155.7,67.8 r0 top
C246 "0.1мк" CAPC1005X06N 58.775,11.7 r180 bottom
C247 "0.1мк" CAPC1005X06N 155.547,66.675 r0 top
C248 "0.1мк" CAPC1005X06N 121.925,54.8 r90 top
C249 "39" CAPC1005X06N 164.975,46.35 r270 top
C250 "39" CAPC1005X06N 164.866,61.396 r270 top
C251 "0.1мк" CAPC1005X06N 58.05,3.575 r180 top
C252 "0.1мк" CAPC1005X06N 157.117,64.389 r90 top
C253 "0.1мк" CAPC1005X06N 120.9,54.8 r90 top
C254 "2.2мк" CAPC1005X06N 157.498,42.037 r180 top
C255 "2.2мк" CAPC1005X06N 157.5,40.975 r180 top
C256 "10мк" CAPC1608X08L 147.089,51.925 r180 top
C257 "2.2мк" CAPC1005X06N 157.117,57.658 r90 top
C258 "2.2мк" CAPC1005X06N 157.25,54.975 r90 top
C259 "10мк" CAPC1608X08L 147.3,54.35 r180 top
C260 "0.1мк" CAPC1005X06N 155.466,50.673 r0 top
C261 "0.1мк" CAPC1005X06N 56.1,3.575 r0 top
C262 "0.1мк" CAPC1005X06N 147.25,50.75 r180 top
C263 "0.1мк" CAPC1005X06N 147.44,55.501 r180 top
C264 "0.1мк" CAPC1005X06N 156.99,48.641 r90 top
C265 "0.1мк" CAPC1005X06N 157.117,59.563 r270 top
C266 "0.1мк" CAPC1005X06N 157.117,43.561 r270 top
C267 "0.1мк" CAPC1005X06N 147.084,39.624 r180 top
C268 "1мк" CAPC1005X06N 54.65,11.075 r180 bottom
C269 "0.1мк" CAPC1005X06N 147.338,66.675 r180 top
C270 "100мк" CAPC3216X19L 161.425,29.658 r0 top
C271 "10мк" CAPC1608X08L 164.6,29.15 r180 top
C272 "0.1мк" CAPC1005X06N 164.727,30.293 r180 top
C273 "0.01мк" CAPC1005X06N 165.878,12.907 r90 bottom
C274 "10мк" CAPC1608X08L 164.991,19.304 r180 top
C275 "0.1мк" CAPC1005X06N 166.887,12.907 r90 bottom
C276 "0.1мк" CAPC1005X06N 164.356,6.223 r180 top
C277 "51" CAPC1005X06N 164.61,4.237 r90 top
C278 "1мк" CAPC1005X06N 161.737,33.147 r0 top
C279 "51" CAPC1005X06N 165.626,4.237 r90 top
C280 "47мк" CAPC2012X12L 167.275,29.95 r0 top
C281 "51" CAPC1005X06N 166.723,4.237 r90 top
C282 "0.1мк" CAPC1005X06N 167.658,18.161 r0 top
C283 "51" CAPC1005X06N 167.739,4.237 r90 top
C284 "100мк" CAPC3216X19L 161.275,21.6 r0 top
C285 "0.1мк" CAPC1005X06N 165.118,18.161 r180 top
C286 "10мк" CAPC1608X08L 155.593,12.192 r90 top
C287 "1000" CAPC1005X06N 169.23,5.334 r180 top
C288 "10мк" CAPC1608X08L 164.5,20.95 r180 top
C289 "0.1мк" CAPC1005X06N 156.736,12.192 r90 top
C290 "0.1мк" CAPC1005X06N 169.944,8.89 r270 top
C291 "0.1мк" CAPC1005X06N 164.373,22.093 r180 top
C292 "1мк" CAPC1005X06N 161.689,24.892 r0 top
C293 "47мк" CAPC2012X12L 167.65,21.75 r0 top
C294 "0.1мк" CAPC1005X06N 169.055,16.081 r90 top
C295 "0.1мк" CAPC1005X06N 168.928,8.89 r270 top
C296 "10" CAPC1005X06N 175.024,22.479 r270 top
C297 "18" CAPC1005X06N 38.7,8.05 r0 top
C298 "10" CAPC1005X06N 175.151,16.002 r90 top
C299 "18" CAPC1005X06N 40.65,9.6 r270 top
C301 "10" CAPC1005X06N 177.137,22.225 r270 top
C303 "10" CAPC1005X06N 178.199,16.129 r90 top
C306 "30" CAPC1005X06N 186.644,16.637 r180 top
C307 "8.2" CAPC1005X06N 186.596,18.288 r270 top
C308 "36" CAPC1005X06N 185.105,5.816 r180 top
C309 "36" CAPC1005X06N 186.042,27.215 r180 top
C312 "15" CAPC1005X06N 185.486,7.419 r270 top
C313 "15" CAPC1005X06N 186.55,28.787 r270 top
C314 "82" CAPC1005X06N 188.628,16.637 r180 top
C315 "18" CAPC1005X06N 188.12,17.653 r180 top
C316 "120" CAPC1005X06N 187.137,5.816 r180 top
C317 "120" CAPC1005X06N 188.074,27.215 r180 top
C318 "30" CAPC1005X06N 187.089,6.959 r180 top
C319 "30" CAPC1005X06N 188.074,28.358 r180 top
C320 "47" CAPC1005X06N 190.152,17.653 r180 top
C321 "56" CAPC1005X06N 189.121,6.959 r180 top
C322 "56" CAPC1005X06N 190.106,28.358 r180 top
C327 "22мк" CAPC2012X12L 38.15,14.975 r270 top
C331 "1мк" CAPC1005X06N 58,9.575 r0 bottom
C332 "1мк" CAPC1005X06N 58,7.375 r0 bottom
C334 "1мк" CAPC1005X06N 58,10.625 r0 bottom
C341 "1мк" CAPC1005X06N 77.728,18.365 r270 top
C342 "1мк" CAPC1005X06N 76.712,18.365 r270 top
C344 "1мк" CAPC1005X06N 75.696,18.365 r270 top
C345 "1мк" CAPC1005X06N 74.68,18.365 r270 top
C346 "0.1мк" CAPC1005X06N 37.825,17.56 r90 top
C347 "4.7мк" CAPC2012X12L 70.616,13.285 r90 top
C348 "4.7мк" CAPC2012X12L 68.838,13.285 r90 top
C349 "0.1мк" CAPC1608X08L 23.875,16.125 r270 top
C350 "4.7мк" CAPC2012X12L 80.519,13.462 r0 top
C351 "4.7мк" CAPC2012X12L 80.475,16.825 r0 top
C352 "1000" CAPRD7.5-9X5 26.1,5.575 r180 top
C353 "4.7мк" CAPC2012X12L 80.5,15.15 r0 top
C354 "4.7мк" CAPC2012X12L 80.525,11.75 r0 top
C355 "22мк" CAPC2012X12L 85.65,16.95 r180 top
C356 "22мк" CAPC2012X12L 85.65,18.8 r180 top
C357 "0.1мк" CAPC1608X08L 21.717,17.018 r0 top
C358 "0.1мк" CAPC1608X08L 20.447,12.827 r270 top
C359 "0.1мк" CAPC1005X06N 128.238,64.558 r180 top
C? "47мк" CAPMP7343X28L 215.537,4.126 r90 top
C? "10мк" CAPC3225X27L 234.363,1.426 r0 top
C? "10мк" CAPC3225X27L 239.588,1.426 r0 top
C? "22мк" CAPC2012X12L 209.986,0.826 r0 top
C? "0.1мк" CAPC1005X06N 251.088,0.526 r0 top
C? "1мк" CAPC1005X06N 220.412,0.526 r0 top
D1 "W25Q256JVEIQ" SON127P800X70_HS-9N 114.73,42.41 r0 top
D2 "25CSM04-I/MF" SON127P600X80_HS-9N 129.283,42.672 r180 top
DA2 "TPS563210A" TSOP65P280X110-8N 67.768,56.476 r180 top
DA3 "171050601" TO263-7EP 83.8,41.03 r90 top
DA5 "TPS563210A" TSOP65P280X110-8N 57.076,55.849 r180 top
DA6 "TPS563210A" TSOP65P280X110-8N 58.27,66.047 r180 top
DA7 "TPS563210A" TSOP65P280X110-8N 81.255,58.708 r0 top
DA8 "PSD15C" SOT0P254X110-2N 21.59,39.751 r90 top
DA9 "PSD15C" SOT0P254X110-2N 21.59,53.213 r90 top
DA10 "TPS563210A" TSOP65P280X110-8N 96.348,44.941 r180 top
DA11 "TPS563210A" TSOP65P280X110-8N 54.483,25.966 r90 top
DA12 "749020023A" 749020023A 26.416,27.051 r180 top
DA13 "TPS7A4700" QFN65P500X500X100_HS-21L 99.003,65.752 r180 top
DA14 "PE4312C-Z" QFN50P400X400X80_HS-21L 187.859,45.565 r180 top
DA15 "PE4312C-Z" QFN50P400X400X80_HS-21L 187.796,61.035 r180 top
DA16 "TPS7A4700" QFN65P500X500X100_HS-21L 149.583,30.677 r0 top
DA17 "TPS7A4700" QFN65P500X500X100_HS-21L 135.801,63.556 r270 top
DA18 "LTC6401IUD-14" QFN50P300X300X75_HS-17L 170.571,46.355 r270 top
DA19 "LTC6401IUD-14" QFN50P300X300X75_HS-17L 170.631,61.568 r270 top
DA20 "TPS7A4700" QFN65P500X500X100_HS-21L 165.626,33.739 r180 top
DA21 "TPS7A4700" QFN65P500X500X100_HS-21L 165.664,25.527 r180 top
DA? "LM60440DRPKR" WQFN-13 256.164,1.826 r0 top
DD1 "XC7Z020-2CLG484I" BGA484C80P22X22_1900X1900X160 127.012,29.025 r0 top
DD2 "MAX13433EETD+" SON40P300X80_HS-15L 100.875,21.7 r270 top
DD3 "MAX13433EETD+" SON40P300X80_HS-15L 105.447,21.7 r270 top
DD4 "ISO3080DWR" SOIC127P1030X265-16N 37.287,47.117 r180 top
DD5 "SN74LVC2G14" SOT65P210X110-6L 71.882,8.509 r90 top
DD6 "MT41K256M16TW-107" BGA96C80P9X16_800X1400X110 109.499,34.468 r270 top
DD7 "KSZ9031RNXIC" QFN50P700X700-48V6M 40.163,26.777 r0 top
DD8 "DAC8571IDGKR" TSOP65P490X110-8L 95.48,56.43 r180 top
DD9 "ADCLK944BCPZ" QFN50P300X300X100_HS-17L 121.896,64.558 r270 top
DD10 "LTC2208CUP" QFN50P900X900X100_HS-65L 151.342,45.123 r180 top
DD11 "LTC2208CUP" QFN50P900X900X100_HS-65L 151.549,61.012 r180 top
DD12 "AD9783BCPZ" LFCSP_VQ_72 162.96,12.259 r270 top
DD13 "CP2102N" QFN50P500X500X80_HS-29N 45.925,6.25 r270 top
DD14 "NAU8822AYG" QFN50P500X500X100_HS-33L 75.175,13.9 r270 top
DD15 "ADuM3160" SOIC127P1030X265-16N 31.293,13.589 r0 top
DD16 "HS-100B" TSQFP50P900X900X160-48N 56.525,9.325 r90 top
DD17 "USB2422I-MJ" QFN50P400X400X80_HS-25L 42.5,13.125 r90 top
F1 "20mA" FUSC1607X85N 24.285,38.1 r180 top
F3 "20mA" FUSC1607X85N 22.225,50.292 r0 top
G1 "33.333 MHz" XTAL_ASFLMB-33.333MHZ-LC-T 122.725,41.575 r0 top
G2 "122.88 MHz" "CVHD-950 Model" 111.093,58.59 r0 top
HL1 "" CD1608-0603_GREEN 144.125,7.65 r270 top value=зеленый
L1 "2,2мкГн" CSAB0420 72.975,51.65 r270 top
L3 "BLM18PG121SN1D" INDC1608X08L 55.55,16.25 r180 top
L4 "2,2мкГн" CSAB0420 62.625,51.15 r270 top
L5 "2,2мкГн" CSAB0420 63.858,61.269 r270 top
L6 "2,2мкГн" CSAB0420 73.234,63.41 r90 top
L7 "2,2мкГн" CSAB0420 80.6,64.1 r0 top
L8 "BLM18PG121SN1D" INDC1608X08L 123.825,40.8 r0 bottom
L9 "BLM18PG121SN1D" INDC1608X08L 124.075,44.95 r180 top
L10 "BLM18PG121SN1D" INDC1608X08L 43.942,38.227 r90 top
L11 "BLM18PG121SN1D" INDC1608X08L 46.085,48.359 r270 top
L12 "BLM18PG121SN1D" INDC1608X08L 103.161,25.002 r270 top
L13 "BLM18PG121SN1D" INDC1608X08L 107.733,24.359 r270 top
L14 "EXC34CE900U" EXC34CE900U 26.035,44.958 r270 top
L15 "2,2мкГн" CSAB0420 104.302,42.781 r270 top
L16 "2,2мкГн" CSAB0420 50.347,21.267 r180 top
L17 "BLM18PG121SN1D" INDC1608X08L 56.875,21.55 r90 top
L18 "BLM18PG121SN1D" INDC1608X08L 40.513,19.304 r180 top
L19 "BLM18PG121SN1D" INDC1608X08L 43.053,20.701 r90 top
L20 "BLM18PG121SN1D" INDC1608X08L 32.766,21.336 r90 top
L21 "BLM18PG121SN1D" INDC1608X08L 40.132,34.417 r180 top
L22 "2,2мкГн" CSAB0420 92.65,60.725 r0 top
L23 "BLM18PG121SN1D" INDC1608X08L 97.263,54.017 r180 top
L24 "2,2мкГн" CSAB0420 105.124,66.336 r180 top
L25 "BLM18PG121SN1D" INDC1608X08L 119.348,62.272 r270 top
L26 "150нГн" INDC0805CS 182.763,44.196 r180 top
L27 "BLM18PG121SN1D" INDC1608X08L 188.478,49.149 r90 top
L28 "150нГн" INDC0805CS 182.708,59.666 r180 top
L29 "BLM18PG121SN1D" INDC1608X08L 188.423,64.614 r90 top
L30 "BLM18PG121SN1D" INDC1608X08L 119.983,60.367 r0 top
L31 "2,2мкГн" CSAB0420 143.487,31.02 r0 top
L32 "2,2мкГн" CSAB0420 136.4,55.25 r90 top
L33 "110нГн" INDC0805CS 180.096,44.831 r90 top
L34 "110нГн" INDC0805CS 180.041,60.174 r90 top
L35 "BLM18PG121SN1D" INDC1608X08L 168.793,42.799 r0 top
L36 "BLM18PG121SN1D" INDC1608X08L 168.611,57.888 r0 top
L37 "BLM18PG121SN1D" INDC1608X08L 156.825,37.05 r90 top
L38 "BLM18PG121SN1D" INDC1608X08L 158.25,66.175 r270 top
L39 "2,2мкГн" CSAB0420 143.528,36.449 r90 top
L40 "2,2мкГн" CSAB0420 143.6,66.1 r0 top
L41 "150нГн" INDC0805CS 165.985,43.103 r180 top
L42 "150нГн" INDC0805CS 165.858,49.58 r180 top
L43 "150нГн" INDC0805CS 165.882,58.221 r180 top
L44 "150нГн" INDC0805CS 165.882,64.698 r180 top
L45 "2,2мкГн" CSAB0420 157.71,33.193 r180 top
L46 "BLM18PG121SN1D" INDC1608X08L 160.005,4.225 r0 top
L47 "2,2мкГн" CSAB0420 157.68,25.273 r0 top
L48 "BLM18PG121SN1D" INDC1608X08L 154.323,12.192 r90 top
L49 "BLM18PG121SN1D" INDC1608X08L 57.905,16.225 r0 top
L50 "180нГн" INDC0805CS 185.072,18.797 r90 top
L51 "220нГн" INDC0805CS 183.835,7.975 r90 top
L52 "220нГн" INDC0805CS 184.899,29.375 r90 top
L53 "180нГн" INDC0805CS 188.628,19.304 r0 top
L54 "220нГн" INDC0805CS 187.645,8.61 r0 top
L55 "220нГн" INDC0805CS 188.71,30.009 r0 top
L56 "BLM18PG121SN1D" INDC1608X08L 62.325,13.07 r90 top
L57 "BLM18PG121SN1D" INDC1608X08L 57.85,8.475 r0 bottom
L58 "2,2мкГн" CSAB0420 39.475,56.85 r0 top
L59 "2,2мкГн" CSAB0420 63.05,22.575 r270 top
L60 "BLM18PG121SN1D" INDC1608X08L 70.235,11.126 r0 top
L61 "2,2мкГн" CSAB0420 65.35,14.5 r90 top
L62 "2,2мкГн" CSAB0420 68.075,22.6 r270 top
L63 "EXC34CE900U" EXC34CE900U 22.1,9.85 r270 top
L? "5.6мкГн" Coilcraft-XAL5030 245.838,3.126 r0 top
R2 "10к" RESC1005X06N 60.625,57.625 r0 top
R4 "2.7к" RESC1005X06N 87.1,30.775 r0 top
R7 "22к" RESC1005X06N 65.228,55.714 r270 top
R8 "10к" RESC1005X06N 64.212,55.714 r270 top
R9 "10к" RESC1005X06N 87.1,29.675 r0 top
R10 "*" RESC1005X06N 50.2,11.175 r180 top
R11 "20к" RESC1005X06N 121.725,47.625 r270 top
R12 "20к" RESC1005X06N 115.125,45.4 r0 bottom
R13 "27к" RESC1005X06N 54.536,55.087 r270 top
R14 "20к" RESC1005X06N 53.525,55.025 r270 top
R15 "33к" RESC1005X06N 55.73,65.285 r270 top
R16 "10к" RESC1005X06N 54.841,65.285 r270 top
R17 "39к" RESC1005X06N 82.378,61.052 r180 top
R18 "10к" RESC1005X06N 83.902,59.955 r90 top
R19 "20к" RESC1005X06N 109.125,43.5 r0 top
R20 "10к" RESC1005X06N 61.175,46.85 r270 top
R21 "10к" RESC1005X06N 62.2,46.85 r270 top
R22 "4.7к" RESC1005X06N 109.1,44.45 r180 top
R23 "510" RESC1005X06N 144.125,10.65 r270 top
R24 "4.7к" RESC1005X06N 127.075,17.775 r90 top
R25 "4.7к" RESC1005X06N 127.125,26.05 r270 bottom
R26 "510" RESC1005X06N 133.495,44.45 r270 top
R27 "10к" RESC1005X06N 124.625,35.475 r270 bottom
R28 "10к" RESC1005X06N 59.442,68.287 r180 top
R29 "10к" RESC1005X06N 111.925,18.7 r90 top
R30 "10к" RESC1005X06N 108.225,18.725 r90 top
R31 "4.7к" RESC1005X06N 106.25,46.741 r180 top
R32 "4.7к" RESC1005X06N 106.275,47.95 r180 top
R33 "180к" RESC1005X06N 102.145,19.287 r0 top
R34 "180к" RESC1005X06N 98.716,20.626 r270 top
R35 "180к" RESC1005X06N 107.025,18.775 r90 top
R36 "180к" RESC1005X06N 103.161,20.811 r270 top
R37 "2к" RESC1005X06N 73.787,8.001 r90 top
R38 "820" RESC1005X06N 29.972,37.915 r90 top
R39 "820" RESC1005X06N 32.258,53.34 r180 top
R40 "180к" RESC1005X06N 30.353,48.214 r180 top
R41 "180к" RESC1005X06N 30.734,44.958 r90 top
R42 "15" RESC1005X06N 30.353,47.325 r180 top
R43 "15" RESC1005X06N 30.353,46.436 r180 top
R44 "2к" RESC1005X06N 65.405,5.588 r180 top
R45 "3.3к" RESC1005X06N 64.77,4.064 r270 top
R46 "120" RESC1005X06N 28.956,46.944 r270 top
R47 "80.6" RESC1005X06N 124.25,17.775 r270 top
R48 "80.6" RESC1005X06N 125.139,17.775 r270 top
R50 "9,53к" RESC1005X06N 93.634,43.869 r270 top
R51 "10к" RESC1005X06N 93.634,45.705 r90 top
R52 "1к" RESC1005X06N 117.65,23.5 r180 bottom
R53 "1к" RESC1005X06N 115.425,24.85 r90 top
R54 "1к" RESC1005X06N 107.45,42.725 r270 top
R55 "1к" RESC1005X06N 107.45,40.85 r270 top
R56 "80.6" RESC1005X06N 108.984,33.782 r180 bottom
R57 "240" RESC1005X06N 107.15,31.75 r270 bottom
R58 "4.7к" RESC1005X06N 101.618,37.338 r90 top
R59 "10к" RESC1005X06N 134.425,17.1 r0 top
R60 "22" RESC1005X06N 48.514,29.464 r0 top
R61 "1к" RESC1005X06N 128,17.775 r270 top
R62 "10к" RESC1005X06N 57.4,23.175 r0 top
R63 "5.76к" RESC1005X06N 53.721,28.506 r180 top
R64 "10к" RESC1005X06N 53.721,29.395 r180 top
R65 "22" RESC1005X06N 48.514,28.575 r0 top
R66 "22" RESC1005X06N 48.514,27.686 r180 top
R67 "22" RESC1005X06N 48.514,26.797 r180 top
R68 "22" RESC1005X06N 48.514,25.908 r0 top
R69 "22" RESC1005X06N 48.514,25.019 r0 top
R70 "120к" RESC1005X06N 56.769,24.765 r270 top
R71 "10к" RESC1005X06N 45.339,30.861 r90 top
R72 "10к" RESC1005X06N 45.339,23.368 r270 top
R73 "10к" RESC1005X06N 46.225,22.9 r270 top
R74 "10к" RESC1005X06N 47.117,23.368 r270 top
R75 "1к" RESC1005X06N 47.117,30.861 r90 top
R76 "1к" RESC1005X06N 46.228,30.861 r90 top
R77 "10к" RESC1005X06N 44.831,32.258 r0 top
R78 "1к" RESC1005X06N 48.075,31.95 r270 top
R79 "1к" RESC1005X06N 49.025,31.95 r270 top
R80 "12.4к" RESC1005X06N 34.925,31.496 r90 top
R81 "1к" RESC1005X06N 39.497,20.828 r90 top
R82 "75" RESC1005X06N 24.13,30.607 r0 bottom
R83 "1к" RESC1005X06N 38.354,20.828 r90 top
R84 "75" RESC1005X06N 24.13,27.559 r0 bottom
R85 "75" RESC1005X06N 24.13,24.638 r0 bottom
R86 "75" RESC1005X06N 24.13,21.59 r0 bottom
R87 "330" RESC1005X06N 27.05,37.025 r0 top
R88 "10к" RESC1005X06N 188.097,40.767 r180 top
R89 "100" RESC1005X06N 188.097,41.656 r180 top
R90 "100" RESC1005X06N 184.875,49.55 r180 top
R91 "10к" RESC1005X06N 188.55,56.237 r180 top
R92 "100" RESC1005X06N 188.55,57.126 r180 top
R93 "100" RESC1005X06N 188.05,66.7 r180 top
R94 "10к" RESC1005X06N 185.875,50.525 r0 top
R95 "10к" RESC1005X06N 188.025,67.675 r180 top
R96 "10к" RESC1005X06N 190.764,43.815 r90 top
R97 "10к" RESC1005X06N 190.709,58.973 r90 top
R98 "1к" RESC1005X06N 100.687,57.234 r0 top
R99 "100" RESC1005X06N 98.909,55.61 r270 top
R100 "1к" RESC1005X06N 102.465,57.234 r0 top
R101 "130" RESC1005X06N 126.762,65.447 r270 top
R102 "82" RESC1005X06N 158.006,46.228 r270 top
R103 "130" RESC1005X06N 126.762,63.542 r90 top
R104 "82" RESC1005X06N 158.006,48.006 r90 top
R105 "130" RESC1005X06N 124.047,60.494 r180 top
R106 "82" RESC1005X06N 158.133,62.103 r270 top
R107 "130" RESC1005X06N 122.142,60.494 r0 top
R108 "82" RESC1005X06N 158.133,64.008 r90 top
R109 "15" RESC1005X06N 168.2,45.15 r270 top
R110 "15" RESC1005X06N 168.175,47.5 r90 top
R111 "15" RESC1005X06N 168.225,60.35 r270 top
R112 "15" RESC1005X06N 168.2,62.65 r90 top
R113 "100" RESC1005X06N 153.688,36.957 r270 top
R114 "2к" RESC1005X06N 154.704,36.957 r270 top
R115 "100" RESC1005X06N 169.428,50.165 r180 top
R116 "100" RESC1005X06N 169.558,65.254 r180 top
R117 "100" RESC1005X06N 155.72,38.862 r90 top
R118 "100" RESC1005X06N 156.228,55.037 r90 top
R119 "1к" RESC1005X06N 154.704,38.862 r90 top
R120 "200" RESC1005X06N 122.35,56.325 r0 top
R121 "1к" RESC1005X06N 155.085,55.037 r90 top
R122 "2к" RESC1005X06N 155.72,53.201 r270 top
R123 "1к" RESC1005X06N 156.8,39.175 r270 top
R124 "*" RESC1005X06N 153.434,38.862 r90 top
R125 "1к" RESC1005X06N 158.3,56.575 r90 top
R126 "200" RESC1005X06N 120.475,56.325 r180 top
R127 "*" RESC1005X06N 153.942,55.037 r90 top
R128 "100" RESC1005X06N 154.45,53.201 r270 top
R129 "100" RESC1005X06N 153.815,51.123 r90 top
R130 "100" RESC1005X06N 153.942,67.056 r90 top
R131 "10" RESC1005X06N 164.543,44.75 r180 top
R132 "10" RESC1005X06N 164.55,47.95 r180 top
R133 "10" RESC1005X06N 164.427,59.872 r180 top
R134 "10" RESC1005X06N 164.358,63.047 r180 top
R135 "100" RESC1005X06N 152.164,37.338 r0 top
R136 "100" RESC1005X06N 153.053,53.594 r0 top
R137 "47" RESC1005X06N 166.65,14.85 r90 bottom
R138 "47" RESC1005X06N 165.725,14.85 r90 bottom
R139 "1к" RESC1005X06N 154.577,7.366 r0 top
R140 "100" RESC1005X06N 154.577,6.477 r0 top
R141 "100" RESC1005X06N 154.577,5.588 r0 top
R142 "100" RESC1005X06N 154.577,4.699 r0 top
R143 "100" RESC1005X06N 163.017,4.699 r0 top
R144 "820" RESC1005X06N 167.878,12.882 r270 bottom
R145 "2.7к" RESC1005X06N 169.125,18.575 r270 top
R146 "10к" RESC1005X06N 167.912,6.35 r0 top
R147 "49.9" RESC1005X06N 176.04,22.479 r90 top
R148 "49.9" RESC1005X06N 176.167,16.002 r270 top
R149 "49.9" RESC1005X06N 178.153,22.225 r90 top
R150 "49.9" RESC1005X06N 177.183,16.129 r270 top
R151 "20к" RESC1005X06N 109.15,42.55 r0 top
R152 "0" RESC1005X06N 177.564,17.78 r180 top
R153 "0" RESC1005X06N 177.564,18.669 r180 top
R154 "0" RESC1005X06N 177.564,20.574 r180 top
R155 "0" RESC1005X06N 50.2,12.15 r180 top
R156 "20к" RESC1005X06N 122.675,47.625 r270 top
R157 "0" RESC1005X06N 177.564,19.685 r180 top
R158 "20к" RESC1005X06N 124.575,47.625 r270 top
R159 "20к" RESC1005X06N 123.625,47.625 r270 top
R160 "4.7к" RESC1005X06N 43.45,7.55 r90 bottom
R161 "10к" RESC1005X06N 42.275,5.825 r90 top
R162 "10к" RESC1005X06N 50.525,5.775 r270 top
R163 "20к" RESC1005X06N 45.975,14.4 r0 top
R164 "12к" RESC1005X06N 41.143,11.855 r180 bottom
R165 "51к" RESC1005X06N 41.075,16.175 r180 top
R166 "51к" RESC1005X06N 42.95,16.65 r270 top
R167 "51к" RESC1005X06N 43.925,16.65 r270 top
R168 "51к" RESC1005X06N 41.825,4.3 r180 top
R169 "200" RESC1005X06N 31.7,6.475 r0 top
R170 "*" RESC1005X06N 49.15,14.75 r90 top
R171 "2.2к" RESC1005X06N 80.025,18.175 r0 top
R172 "0" RESC1005X06N 48.15,14.75 r90 top
R173 "0" RESC1005X06N 101.5,10.075 r90 top
R174 "0" RESC1005X06N 83,15.225 r180 top
R175 "470к" RESC1005X06N 31.639,7.5 r180 top
R176 "470к" RESC1005X06N 33.925,7.5 r180 top
R177 "470к" RESC1005X06N 36.211,7.5 r180 top
R178 "330" RESC1005X06N 21.59,15.875 r0 top
R184 "100" RESC1005X06N 73.664,18.411 r270 top
R185 "100" RESC1005X06N 72.775,18.411 r270 top
R186 "100" RESC1005X06N 70.997,16.968 r0 top
R187 "100" RESC1005X06N 70.997,16.079 r0 top
R188 "100" RESC1005X06N 70.997,15.19 r0 top
R? "100к" RESC1005X06N 224.687,0.476 r0 top
R? "9.1к" RESC1005X06N 205.211,0.476 r0 top
R? "100к" RESC1005X06N 229.012,0.476 r0 top
T1 "TC4-1T+" "SM-22 PACKAGE" 175.27,46.355 r0 top
T2 "TC4-1T+" "SM-22 PACKAGE" 175.215,61.444 r0 top
T3 "TC4-1T+" "SM-22 PACKAGE" 181.128,19.157 r0 top
T4 "MABA-011062" "SM-22 PACKAGE" 180.01,8.356 r0 top
T5 "MABA-011062" "SM-22 PACKAGE" 181.12,29.718 r0 top
VD1 "BAS16" SOT23_N 73.787,5.08 r0 top
VD2 "BAS16" SOT23_N 68.453,5.08 r0 top
VD3 "RClamp1255P" SLP2018P6 22.479,13.081 r90 top
VU1 "PC3H7J00000F" SO4-170-1.27 26.924,40.386 r180 top
VU2 "PC3H7J00000F" SO4-170-1.27 26.797,53.848 r180 top
VU3 "PC3H7J00000F" SO4-170-1.27 36.525,4.95 r0 top
X1 "Конструктивный элемент" PIN2_PROBE 130.565,39.259 r0 top
X2 "Конструктивный элемент" PIN2_PROBE 129.048,39.276 r0 top
X3 "Конструктивный элемент" PIN2_PROBE 130.85,17.55 r0 top
X4 "Конструктивный элемент" PIN2_PROBE 129.3,18.5 r0 top
XP1 "XT30UPB-M" XT30UPB-M 23.175,65.4 r90 top
XP2 "IDC2-14MS" IDC2-14MS 58.95,40.825 r90 top
XP3 "FH12-20S-0.5SVA" FH12-20S-0.5SVA 104.511,4.534 r180 top
XP4 "FH12-10S-0.5SVA" FH12-10S-0.5SH 118,8 r0 top
XP6 "WB-02 (MW-2M)" "WB-02 (MW-2M) PITCH 2.00MM" 93.075,5.925 r270 top
XP7 "PLS-3" "PLS-3 (DS1021-1x3)" 112.16,47.15 r90 top
XS1 "TJ16S-8P8C" KLS12-107L 6.001,28.162 r270 top
XS2 "USBB-1J" USB2.5-2H4D 11.997,9.433 r180 top
XS3 "DS1038-15F" DS1038-15F 10.803,53.955 r270 top